# EAGLE board SparkFun_Qwiic_Mini_UV_Sensor_AS7331-Panel (EAGLE 9.6.2), part 1 of 7
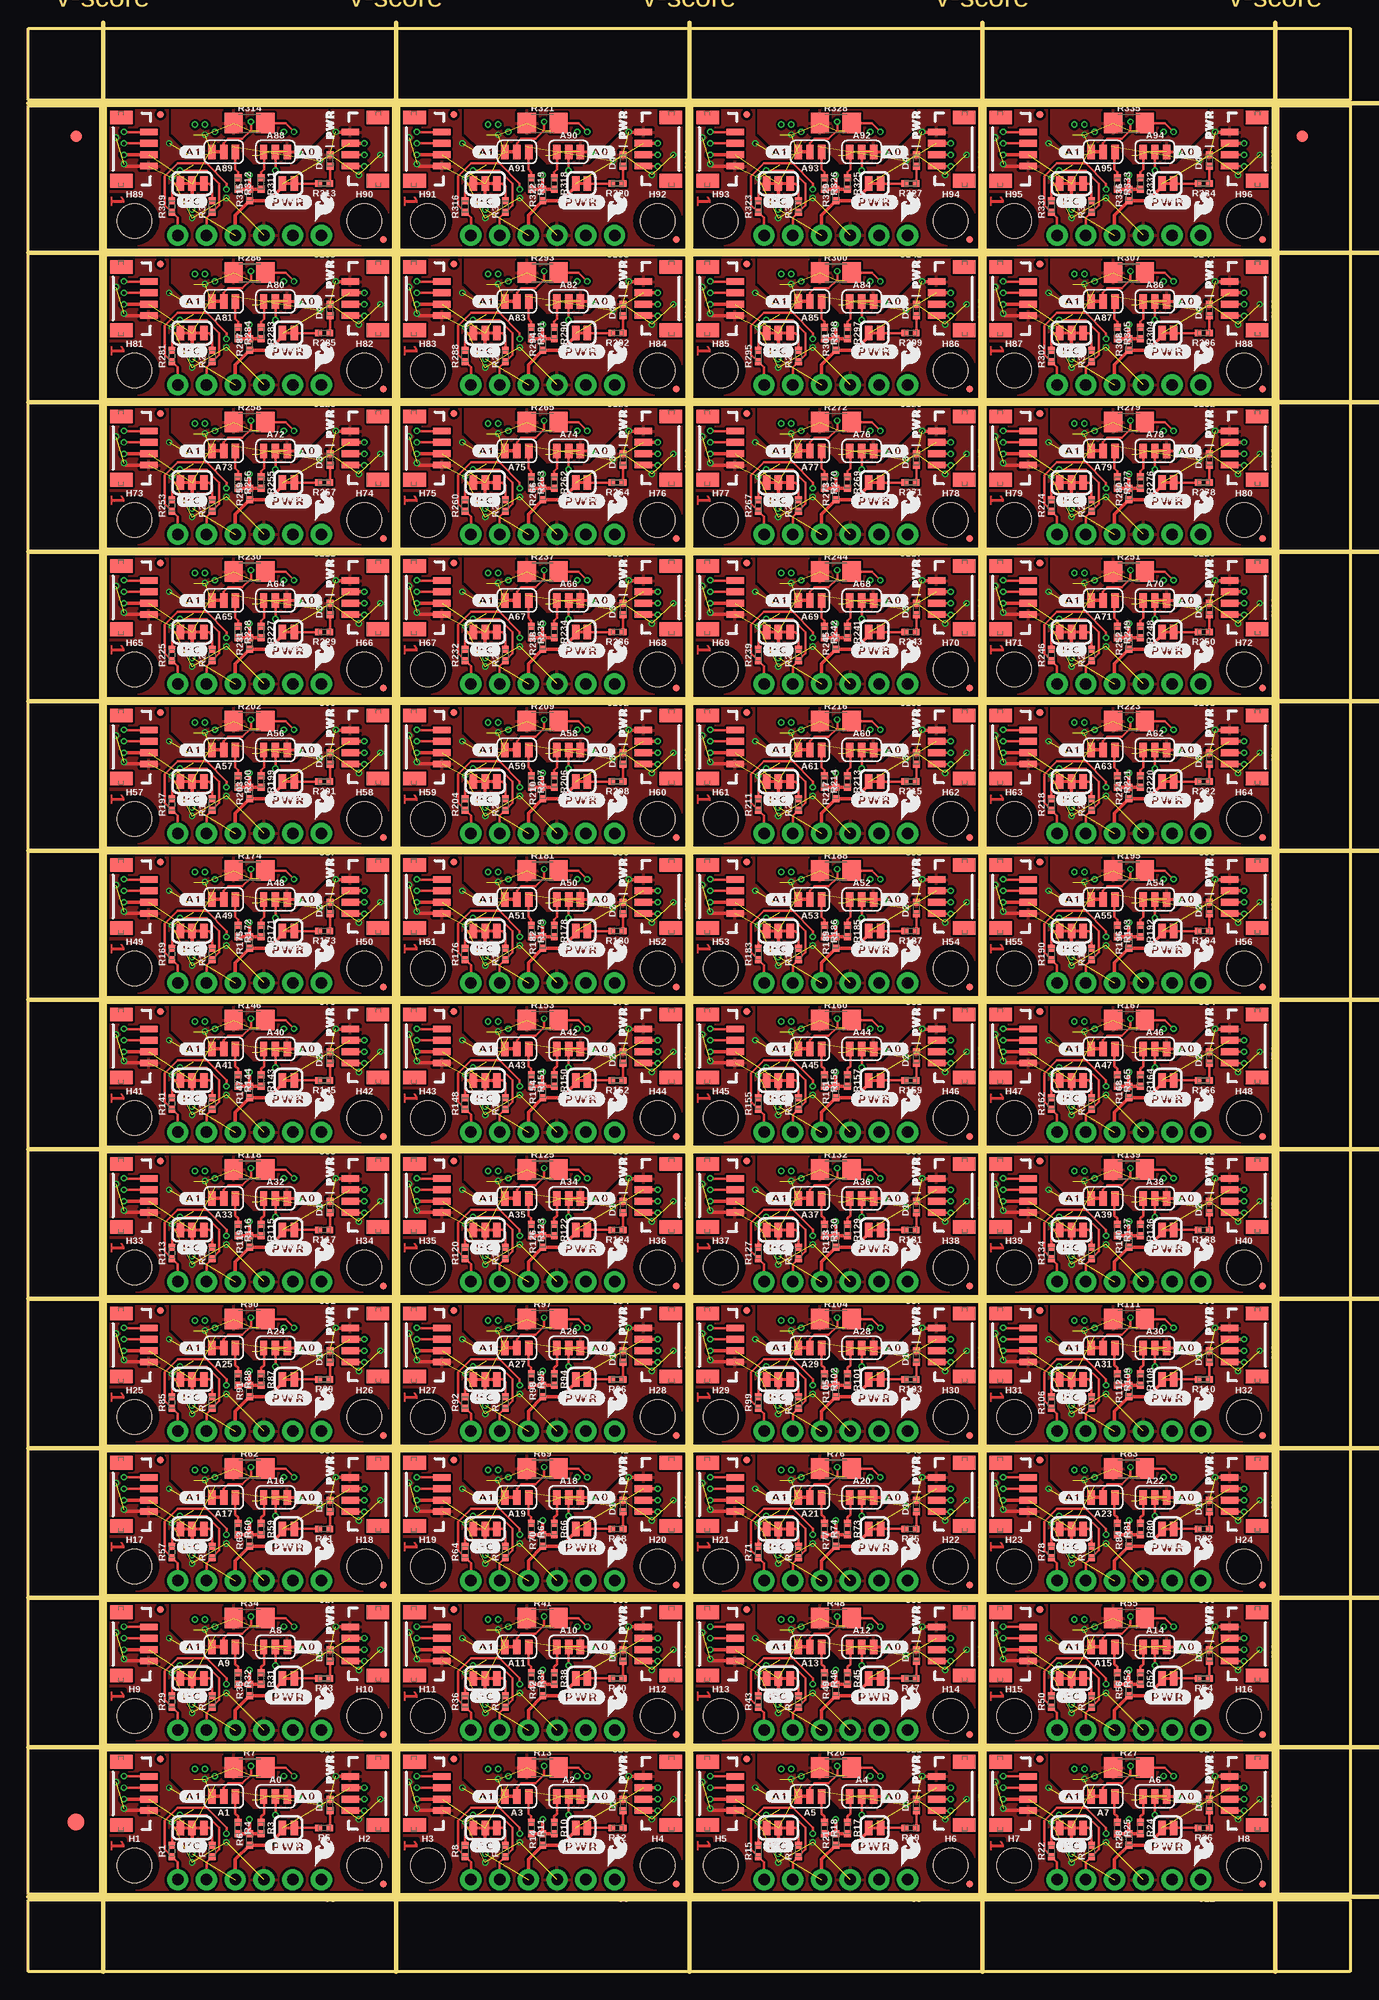
[diagram p0: board, top side]
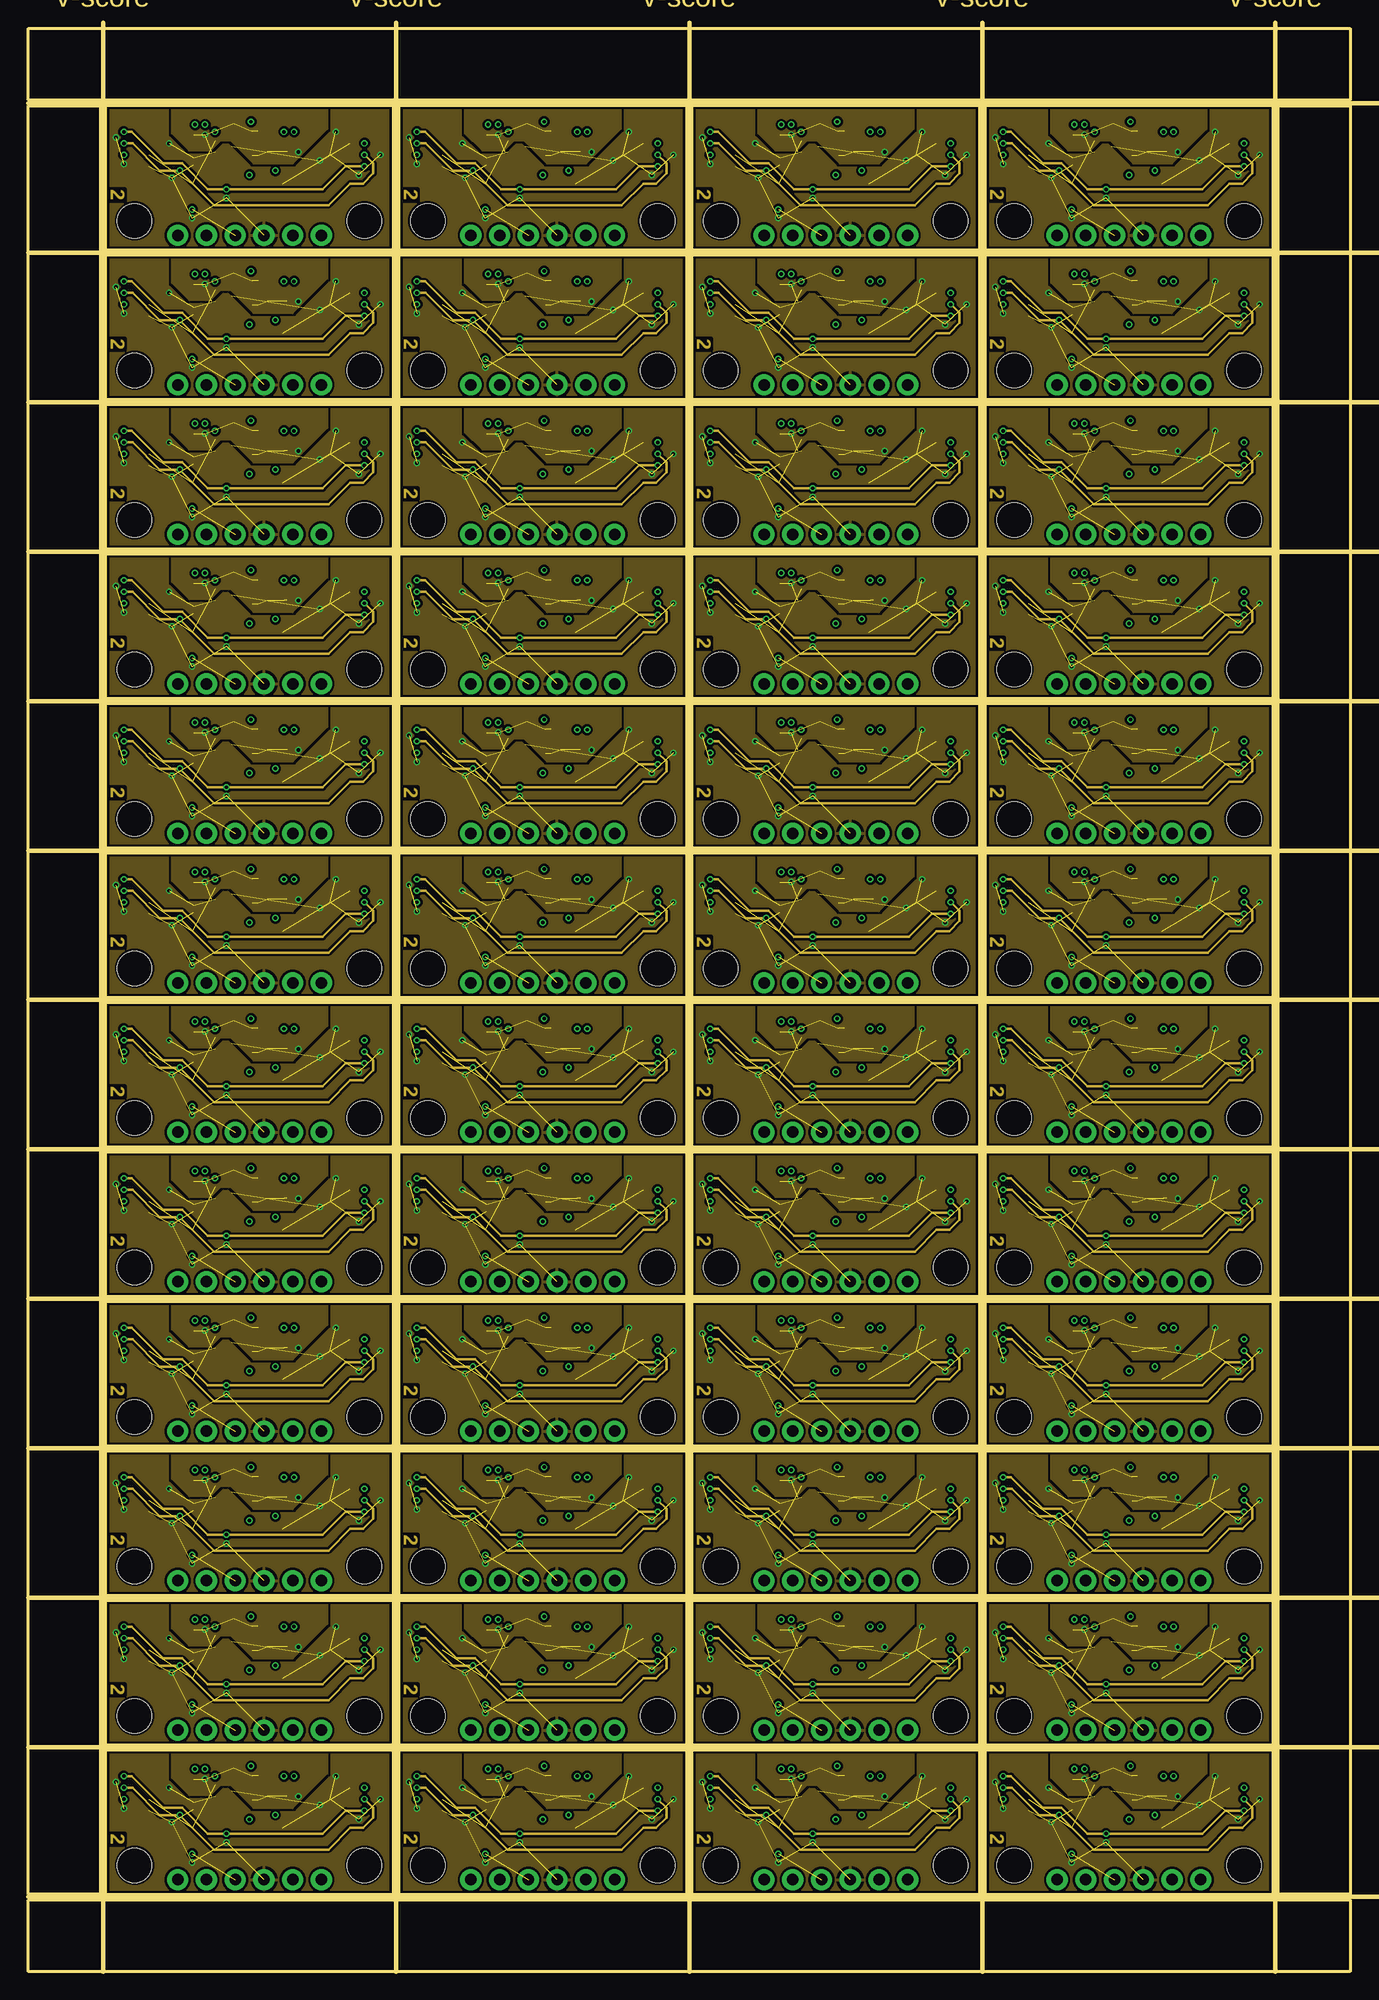
[diagram p1: board, inner layer Route2]
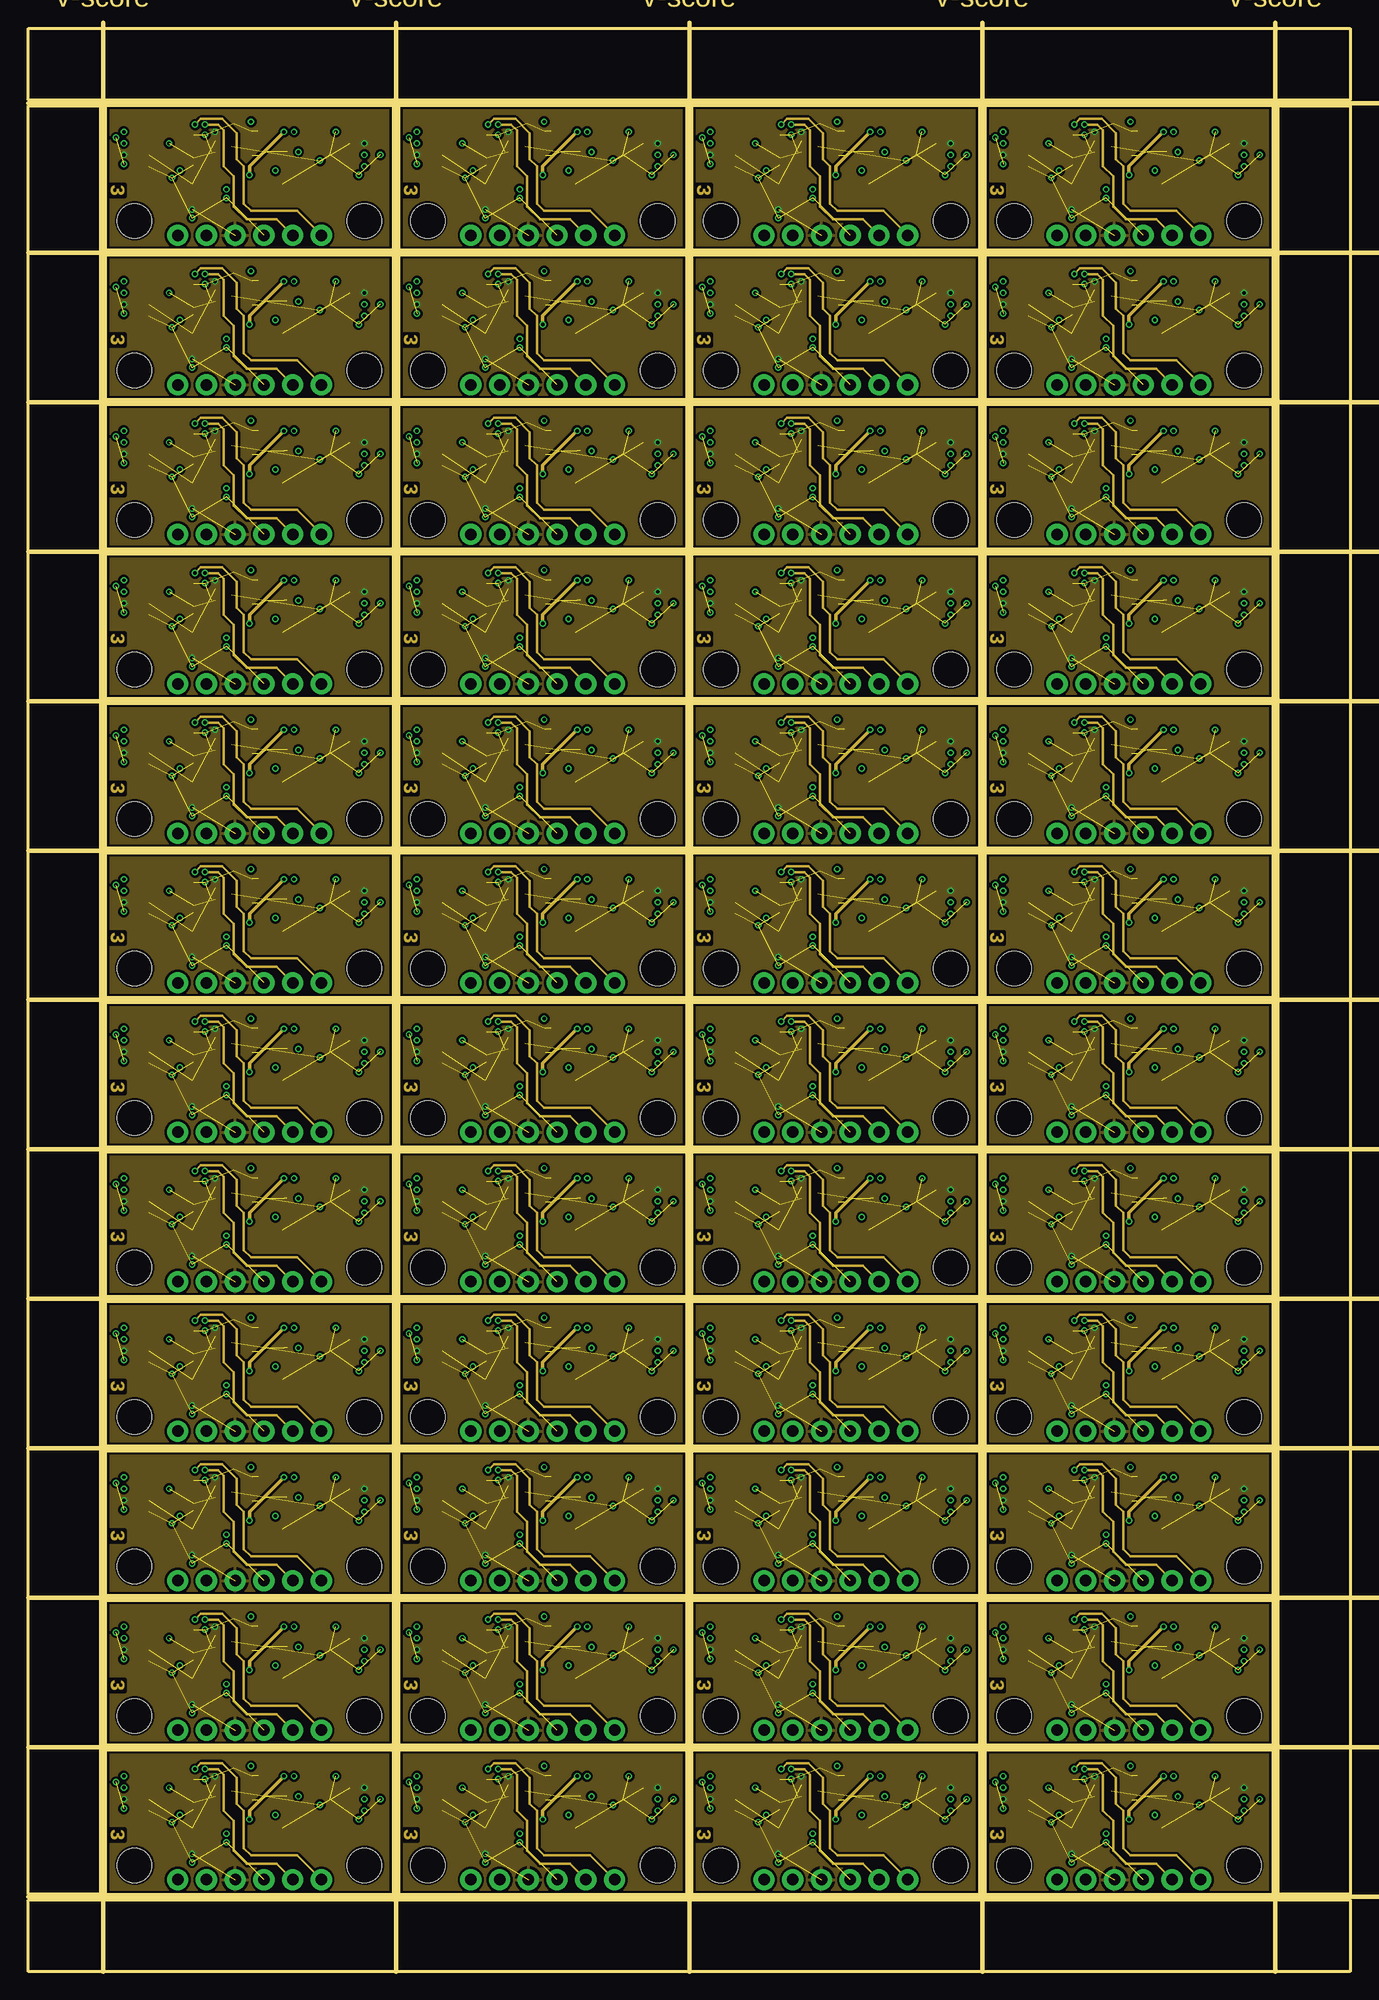
[diagram p2: board, inner layer Route15]
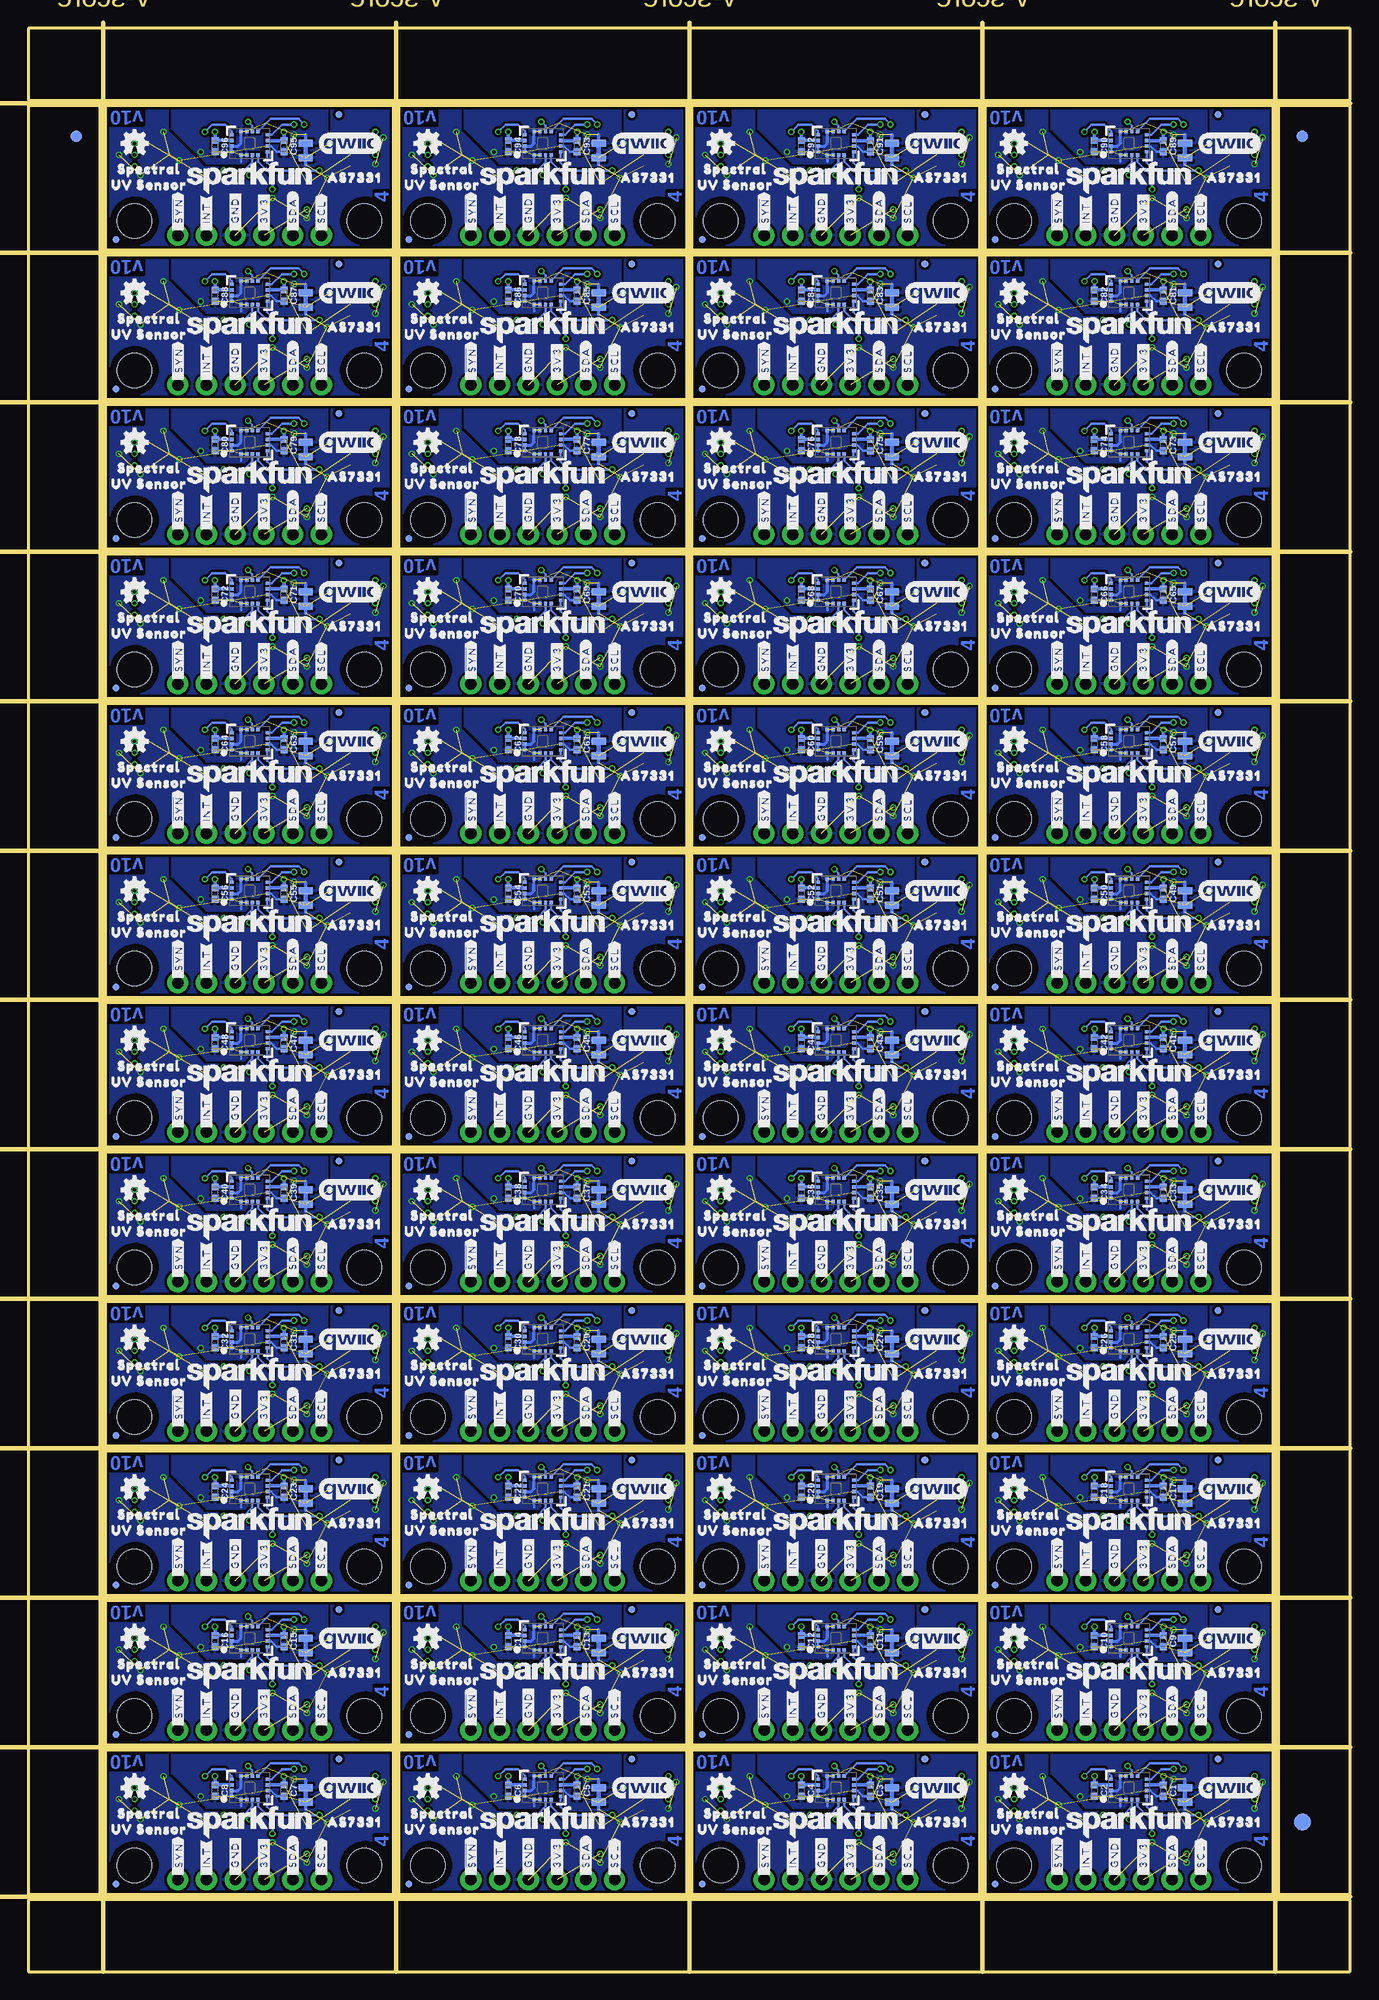
[diagram p3: board, bottom side, seen from below]

Size 116.84 x 171.7 mm. Coordinates in mm from the lower left corner, seen from the top.
Outline: 208 segments
Copper layers (1*2*15*16): Top 0.035559375mm / dielectric 0.47751875mm / Route2 0.035559375mm / dielectric 0.47751875mm / Route15 0.035559375mm / dielectric 0.47751875mm / Bottom 0.035559375mm
Design rules "SparkFun_Qwiic_Mini_UV_Sensor_AS7331": minimum track width 5mil, minimum drill 0.2mm, track to track 5mil, track to pad 5mil, pad to pad 5mil, via to via 5mil, smd to smd 5mil, copper to edge 7mil, drill to drill 7mil, minimum pad ring 5mil, minimum via ring 5mil, stop-mask expansion 2.5mil, vias tented up to drill 25mil, thermal gap 10mil
tRestrict: area 23,14.6 to 23.2,14.7; area 48.9,14.6 to 49.1,14.7; area 74.8,14.6 to 75.1,14.7; area 100.7,14.6 to 101,14.7; area 23,27.8 to 23.2,27.9; area 48.9,27.8 to 49.1,27.9; area 74.8,27.8 to 75.1,27.9; area 100.7,27.8 to 101,27.9; area 23,41 to 23.2,41.1; area 48.9,41 to 49.1,41.1; area 74.8,41 to 75.1,41.1; area 100.7,41 to 101,41.1; 36 more areas
Milling: 18 lines

## Footprints (pad centres in the part's own frame; a part is rotated, then mirrored left to right if it is on the bottom)
SMT-JUMPER_3_1-NC_TRACE_SILK = smd 0.66 x 1.27: 1 -1.041,0; 2 0,0; 3 1.041,0
0402-TIGHT = smd 0.6 x 0.6: 1 -0.5,0; 2 0.5,0
LED-0402 = smd 0.6 x 0.6: A -0.5,0; C 0.5,0
FIDUCIAL-1X2 = smd 1 x 1: 1 0,0
FIDUCIAL-1.5X3 = smd 1.5 x 1.5: 1 0,0
FIDUCIAL-MICRO = smd 0.635 x 0.635: 1 0,0
STAND-OFF-TIGHT = hole 3.048: 0,0
SMT-JUMPER_3_2-NC_TRACE_SILK = smd 0.66 x 1.27: 1 -1.041,0; 2 0,0; 3 1.041,0
JST04_1MM_VERT = smd 0.6 x 1.55: 1 -1.5,0.775; 2 -0.5,0.775; 3 0.5,0.775; 4 1.5,0.775 | smd 1.2 x 2: NC1 -2.8,3.2; NC2 2.8,3.2
1X06_NO_SILK = drill 1.016 pad 1.88: 1 0,0; 2 2.54,0; 3 5.08,0; 4 7.62,0; 5 10.16,0; 6 12.7,0
SMT-JUMPER_2_NC_TRACE_SILK = smd 0.66 x 1.27: 1 -0.521,0; 2 0.521,0
1206 = smd 1.6 x 1.8: 1 -1.4,0; 2 1.4,0
2PT_GND_TIE = smd 1.27 x 0.635: P$1 0,0.635; P$2 0,-0.635
OLGA16 = smd 0.3 x 0.3: 1 -0.75,1.575; 2 -0.25,1.575; 3 0.25,1.575; 4 0.75,1.575; 5 1.05,0.75; 6 1.05,0.25; 7 1.05,-0.25; 8 1.05,-0.75; 9 0.75,-1.575; 10 0.25,-1.575; 11 -0.25,-1.575; 12 -0.75,-1.575; 13 -1.05,-0.75; 14 -1.05,-0.25; 15 -1.05,0.25; 16 -1.05,0.75

## Placement (x,y rotation side)
A0  JUMPER-SMT_3_1-NC_TRACE_SILK  [SMT-JUMPER_3_1-NC_TRACE_SILK]  21.84,15.49 0 top
A1  JUMPER-SMT_3_1-NC_TRACE_SILK  [SMT-JUMPER_3_1-NC_TRACE_SILK]  17.27,15.49 180 top
A2  JUMPER-SMT_3_1-NC_TRACE_SILK  [SMT-JUMPER_3_1-NC_TRACE_SILK]  47.75,15.49 0 top
A3  JUMPER-SMT_3_1-NC_TRACE_SILK  [SMT-JUMPER_3_1-NC_TRACE_SILK]  43.18,15.49 180 top
A4  JUMPER-SMT_3_1-NC_TRACE_SILK  [SMT-JUMPER_3_1-NC_TRACE_SILK]  73.66,15.49 0 top
A5  JUMPER-SMT_3_1-NC_TRACE_SILK  [SMT-JUMPER_3_1-NC_TRACE_SILK]  69.09,15.49 180 top
A6  JUMPER-SMT_3_1-NC_TRACE_SILK  [SMT-JUMPER_3_1-NC_TRACE_SILK]  99.57,15.49 0 top
A7  JUMPER-SMT_3_1-NC_TRACE_SILK  [SMT-JUMPER_3_1-NC_TRACE_SILK]  95,15.49 180 top
A8  JUMPER-SMT_3_1-NC_TRACE_SILK  [SMT-JUMPER_3_1-NC_TRACE_SILK]  21.84,28.7 0 top
A9  JUMPER-SMT_3_1-NC_TRACE_SILK  [SMT-JUMPER_3_1-NC_TRACE_SILK]  17.27,28.7 180 top
A10  JUMPER-SMT_3_1-NC_TRACE_SILK  [SMT-JUMPER_3_1-NC_TRACE_SILK]  47.75,28.7 0 top
A11  JUMPER-SMT_3_1-NC_TRACE_SILK  [SMT-JUMPER_3_1-NC_TRACE_SILK]  43.18,28.7 180 top
A12  JUMPER-SMT_3_1-NC_TRACE_SILK  [SMT-JUMPER_3_1-NC_TRACE_SILK]  73.66,28.7 0 top
A13  JUMPER-SMT_3_1-NC_TRACE_SILK  [SMT-JUMPER_3_1-NC_TRACE_SILK]  69.09,28.7 180 top
A14  JUMPER-SMT_3_1-NC_TRACE_SILK  [SMT-JUMPER_3_1-NC_TRACE_SILK]  99.57,28.7 0 top
A15  JUMPER-SMT_3_1-NC_TRACE_SILK  [SMT-JUMPER_3_1-NC_TRACE_SILK]  95,28.7 180 top
A16  JUMPER-SMT_3_1-NC_TRACE_SILK  [SMT-JUMPER_3_1-NC_TRACE_SILK]  21.84,41.91 0 top
A17  JUMPER-SMT_3_1-NC_TRACE_SILK  [SMT-JUMPER_3_1-NC_TRACE_SILK]  17.27,41.91 180 top
A18  JUMPER-SMT_3_1-NC_TRACE_SILK  [SMT-JUMPER_3_1-NC_TRACE_SILK]  47.75,41.91 0 top
A19  JUMPER-SMT_3_1-NC_TRACE_SILK  [SMT-JUMPER_3_1-NC_TRACE_SILK]  43.18,41.91 180 top
A20  JUMPER-SMT_3_1-NC_TRACE_SILK  [SMT-JUMPER_3_1-NC_TRACE_SILK]  73.66,41.91 0 top
A21  JUMPER-SMT_3_1-NC_TRACE_SILK  [SMT-JUMPER_3_1-NC_TRACE_SILK]  69.09,41.91 180 top
A22  JUMPER-SMT_3_1-NC_TRACE_SILK  [SMT-JUMPER_3_1-NC_TRACE_SILK]  99.57,41.91 0 top
A23  JUMPER-SMT_3_1-NC_TRACE_SILK  [SMT-JUMPER_3_1-NC_TRACE_SILK]  95,41.91 180 top
A24  JUMPER-SMT_3_1-NC_TRACE_SILK  [SMT-JUMPER_3_1-NC_TRACE_SILK]  21.84,55.12 0 top
A25  JUMPER-SMT_3_1-NC_TRACE_SILK  [SMT-JUMPER_3_1-NC_TRACE_SILK]  17.27,55.12 180 top
A26  JUMPER-SMT_3_1-NC_TRACE_SILK  [SMT-JUMPER_3_1-NC_TRACE_SILK]  47.75,55.12 0 top
A27  JUMPER-SMT_3_1-NC_TRACE_SILK  [SMT-JUMPER_3_1-NC_TRACE_SILK]  43.18,55.12 180 top
A28  JUMPER-SMT_3_1-NC_TRACE_SILK  [SMT-JUMPER_3_1-NC_TRACE_SILK]  73.66,55.12 0 top
A29  JUMPER-SMT_3_1-NC_TRACE_SILK  [SMT-JUMPER_3_1-NC_TRACE_SILK]  69.09,55.12 180 top
A30  JUMPER-SMT_3_1-NC_TRACE_SILK  [SMT-JUMPER_3_1-NC_TRACE_SILK]  99.57,55.12 0 top
A31  JUMPER-SMT_3_1-NC_TRACE_SILK  [SMT-JUMPER_3_1-NC_TRACE_SILK]  95,55.12 180 top
A32  JUMPER-SMT_3_1-NC_TRACE_SILK  [SMT-JUMPER_3_1-NC_TRACE_SILK]  21.84,68.33 0 top
A33  JUMPER-SMT_3_1-NC_TRACE_SILK  [SMT-JUMPER_3_1-NC_TRACE_SILK]  17.27,68.33 180 top
A34  JUMPER-SMT_3_1-NC_TRACE_SILK  [SMT-JUMPER_3_1-NC_TRACE_SILK]  47.75,68.33 0 top
A35  JUMPER-SMT_3_1-NC_TRACE_SILK  [SMT-JUMPER_3_1-NC_TRACE_SILK]  43.18,68.33 180 top
A36  JUMPER-SMT_3_1-NC_TRACE_SILK  [SMT-JUMPER_3_1-NC_TRACE_SILK]  73.66,68.33 0 top
A37  JUMPER-SMT_3_1-NC_TRACE_SILK  [SMT-JUMPER_3_1-NC_TRACE_SILK]  69.09,68.33 180 top
A38  JUMPER-SMT_3_1-NC_TRACE_SILK  [SMT-JUMPER_3_1-NC_TRACE_SILK]  99.57,68.33 0 top
A39  JUMPER-SMT_3_1-NC_TRACE_SILK  [SMT-JUMPER_3_1-NC_TRACE_SILK]  95,68.33 180 top
A40  JUMPER-SMT_3_1-NC_TRACE_SILK  [SMT-JUMPER_3_1-NC_TRACE_SILK]  21.84,81.53 0 top
A41  JUMPER-SMT_3_1-NC_TRACE_SILK  [SMT-JUMPER_3_1-NC_TRACE_SILK]  17.27,81.53 180 top
A42  JUMPER-SMT_3_1-NC_TRACE_SILK  [SMT-JUMPER_3_1-NC_TRACE_SILK]  47.75,81.53 0 top
A43  JUMPER-SMT_3_1-NC_TRACE_SILK  [SMT-JUMPER_3_1-NC_TRACE_SILK]  43.18,81.53 180 top
A44  JUMPER-SMT_3_1-NC_TRACE_SILK  [SMT-JUMPER_3_1-NC_TRACE_SILK]  73.66,81.53 0 top
A45  JUMPER-SMT_3_1-NC_TRACE_SILK  [SMT-JUMPER_3_1-NC_TRACE_SILK]  69.09,81.53 180 top
A46  JUMPER-SMT_3_1-NC_TRACE_SILK  [SMT-JUMPER_3_1-NC_TRACE_SILK]  99.57,81.53 0 top
A47  JUMPER-SMT_3_1-NC_TRACE_SILK  [SMT-JUMPER_3_1-NC_TRACE_SILK]  95,81.53 180 top
A48  JUMPER-SMT_3_1-NC_TRACE_SILK  [SMT-JUMPER_3_1-NC_TRACE_SILK]  21.84,94.74 0 top
A49  JUMPER-SMT_3_1-NC_TRACE_SILK  [SMT-JUMPER_3_1-NC_TRACE_SILK]  17.27,94.74 180 top
A50  JUMPER-SMT_3_1-NC_TRACE_SILK  [SMT-JUMPER_3_1-NC_TRACE_SILK]  47.75,94.74 0 top
A51  JUMPER-SMT_3_1-NC_TRACE_SILK  [SMT-JUMPER_3_1-NC_TRACE_SILK]  43.18,94.74 180 top
A52  JUMPER-SMT_3_1-NC_TRACE_SILK  [SMT-JUMPER_3_1-NC_TRACE_SILK]  73.66,94.74 0 top
A53  JUMPER-SMT_3_1-NC_TRACE_SILK  [SMT-JUMPER_3_1-NC_TRACE_SILK]  69.09,94.74 180 top
A54  JUMPER-SMT_3_1-NC_TRACE_SILK  [SMT-JUMPER_3_1-NC_TRACE_SILK]  99.57,94.74 0 top
A55  JUMPER-SMT_3_1-NC_TRACE_SILK  [SMT-JUMPER_3_1-NC_TRACE_SILK]  95,94.74 180 top
A56  JUMPER-SMT_3_1-NC_TRACE_SILK  [SMT-JUMPER_3_1-NC_TRACE_SILK]  21.84,107.95 0 top
A57  JUMPER-SMT_3_1-NC_TRACE_SILK  [SMT-JUMPER_3_1-NC_TRACE_SILK]  17.27,107.95 180 top
A58  JUMPER-SMT_3_1-NC_TRACE_SILK  [SMT-JUMPER_3_1-NC_TRACE_SILK]  47.75,107.95 0 top
A59  JUMPER-SMT_3_1-NC_TRACE_SILK  [SMT-JUMPER_3_1-NC_TRACE_SILK]  43.18,107.95 180 top
A60  JUMPER-SMT_3_1-NC_TRACE_SILK  [SMT-JUMPER_3_1-NC_TRACE_SILK]  73.66,107.95 0 top
A61  JUMPER-SMT_3_1-NC_TRACE_SILK  [SMT-JUMPER_3_1-NC_TRACE_SILK]  69.09,107.95 180 top
A62  JUMPER-SMT_3_1-NC_TRACE_SILK  [SMT-JUMPER_3_1-NC_TRACE_SILK]  99.57,107.95 0 top
A63  JUMPER-SMT_3_1-NC_TRACE_SILK  [SMT-JUMPER_3_1-NC_TRACE_SILK]  95,107.95 180 top
A64  JUMPER-SMT_3_1-NC_TRACE_SILK  [SMT-JUMPER_3_1-NC_TRACE_SILK]  21.84,121.16 0 top
A65  JUMPER-SMT_3_1-NC_TRACE_SILK  [SMT-JUMPER_3_1-NC_TRACE_SILK]  17.27,121.16 180 top
A66  JUMPER-SMT_3_1-NC_TRACE_SILK  [SMT-JUMPER_3_1-NC_TRACE_SILK]  47.75,121.16 0 top
A67  JUMPER-SMT_3_1-NC_TRACE_SILK  [SMT-JUMPER_3_1-NC_TRACE_SILK]  43.18,121.16 180 top
A68  JUMPER-SMT_3_1-NC_TRACE_SILK  [SMT-JUMPER_3_1-NC_TRACE_SILK]  73.66,121.16 0 top
A69  JUMPER-SMT_3_1-NC_TRACE_SILK  [SMT-JUMPER_3_1-NC_TRACE_SILK]  69.09,121.16 180 top
A70  JUMPER-SMT_3_1-NC_TRACE_SILK  [SMT-JUMPER_3_1-NC_TRACE_SILK]  99.57,121.16 0 top
A71  JUMPER-SMT_3_1-NC_TRACE_SILK  [SMT-JUMPER_3_1-NC_TRACE_SILK]  95,121.16 180 top
A72  JUMPER-SMT_3_1-NC_TRACE_SILK  [SMT-JUMPER_3_1-NC_TRACE_SILK]  21.84,134.37 0 top
A73  JUMPER-SMT_3_1-NC_TRACE_SILK  [SMT-JUMPER_3_1-NC_TRACE_SILK]  17.27,134.37 180 top
A74  JUMPER-SMT_3_1-NC_TRACE_SILK  [SMT-JUMPER_3_1-NC_TRACE_SILK]  47.75,134.37 0 top
A75  JUMPER-SMT_3_1-NC_TRACE_SILK  [SMT-JUMPER_3_1-NC_TRACE_SILK]  43.18,134.37 180 top
A76  JUMPER-SMT_3_1-NC_TRACE_SILK  [SMT-JUMPER_3_1-NC_TRACE_SILK]  73.66,134.37 0 top
A77  JUMPER-SMT_3_1-NC_TRACE_SILK  [SMT-JUMPER_3_1-NC_TRACE_SILK]  69.09,134.37 180 top
A78  JUMPER-SMT_3_1-NC_TRACE_SILK  [SMT-JUMPER_3_1-NC_TRACE_SILK]  99.57,134.37 0 top
A79  JUMPER-SMT_3_1-NC_TRACE_SILK  [SMT-JUMPER_3_1-NC_TRACE_SILK]  95,134.37 180 top
A80  JUMPER-SMT_3_1-NC_TRACE_SILK  [SMT-JUMPER_3_1-NC_TRACE_SILK]  21.84,147.57 0 top
A81  JUMPER-SMT_3_1-NC_TRACE_SILK  [SMT-JUMPER_3_1-NC_TRACE_SILK]  17.27,147.57 180 top
A82  JUMPER-SMT_3_1-NC_TRACE_SILK  [SMT-JUMPER_3_1-NC_TRACE_SILK]  47.75,147.57 0 top
A83  JUMPER-SMT_3_1-NC_TRACE_SILK  [SMT-JUMPER_3_1-NC_TRACE_SILK]  43.18,147.57 180 top
A84  JUMPER-SMT_3_1-NC_TRACE_SILK  [SMT-JUMPER_3_1-NC_TRACE_SILK]  73.66,147.57 0 top
A85  JUMPER-SMT_3_1-NC_TRACE_SILK  [SMT-JUMPER_3_1-NC_TRACE_SILK]  69.09,147.57 180 top
A86  JUMPER-SMT_3_1-NC_TRACE_SILK  [SMT-JUMPER_3_1-NC_TRACE_SILK]  99.57,147.57 0 top
A87  JUMPER-SMT_3_1-NC_TRACE_SILK  [SMT-JUMPER_3_1-NC_TRACE_SILK]  95,147.57 180 top
A88  JUMPER-SMT_3_1-NC_TRACE_SILK  [SMT-JUMPER_3_1-NC_TRACE_SILK]  21.84,160.78 0 top
A89  JUMPER-SMT_3_1-NC_TRACE_SILK  [SMT-JUMPER_3_1-NC_TRACE_SILK]  17.27,160.78 180 top
A90  JUMPER-SMT_3_1-NC_TRACE_SILK  [SMT-JUMPER_3_1-NC_TRACE_SILK]  47.75,160.78 0 top
A91  JUMPER-SMT_3_1-NC_TRACE_SILK  [SMT-JUMPER_3_1-NC_TRACE_SILK]  43.18,160.78 180 top
A92  JUMPER-SMT_3_1-NC_TRACE_SILK  [SMT-JUMPER_3_1-NC_TRACE_SILK]  73.66,160.78 0 top
A93  JUMPER-SMT_3_1-NC_TRACE_SILK  [SMT-JUMPER_3_1-NC_TRACE_SILK]  69.09,160.78 180 top
A94  JUMPER-SMT_3_1-NC_TRACE_SILK  [SMT-JUMPER_3_1-NC_TRACE_SILK]  99.57,160.78 0 top
A95  JUMPER-SMT_3_1-NC_TRACE_SILK  [SMT-JUMPER_3_1-NC_TRACE_SILK]  95,160.78 180 top
C1  0.1uF  [0402-TIGHT]  16.51,16 270 bottom
C2  0.1uF  [0402-TIGHT]  22.61,16 270 bottom
C3  0.1uF  [0402-TIGHT]  42.42,16 270 bottom
C4  0.1uF  [0402-TIGHT]  48.51,16 270 bottom
C5  0.1uF  [0402-TIGHT]  68.33,16 270 bottom
C6  0.1uF  [0402-TIGHT]  74.42,16 270 bottom
C7  0.1uF  [0402-TIGHT]  94.23,16 270 bottom
C8  0.1uF  [0402-TIGHT]  100.33,16 270 bottom
C9  0.1uF  [0402-TIGHT]  16.51,29.21 270 bottom
C10  0.1uF  [0402-TIGHT]  22.61,29.21 270 bottom
C11  0.1uF  [0402-TIGHT]  42.42,29.21 270 bottom
C12  0.1uF  [0402-TIGHT]  48.51,29.21 270 bottom
C13  0.1uF  [0402-TIGHT]  68.33,29.21 270 bottom
C14  0.1uF  [0402-TIGHT]  74.42,29.21 270 bottom
C15  0.1uF  [0402-TIGHT]  94.23,29.21 270 bottom
C16  0.1uF  [0402-TIGHT]  100.33,29.21 270 bottom
C17  0.1uF  [0402-TIGHT]  16.51,42.42 270 bottom
C18  0.1uF  [0402-TIGHT]  22.61,42.42 270 bottom
C19  0.1uF  [0402-TIGHT]  42.42,42.42 270 bottom
C20  0.1uF  [0402-TIGHT]  48.51,42.42 270 bottom
C21  0.1uF  [0402-TIGHT]  68.33,42.42 270 bottom
C22  0.1uF  [0402-TIGHT]  74.42,42.42 270 bottom
C23  0.1uF  [0402-TIGHT]  94.23,42.42 270 bottom
C24  0.1uF  [0402-TIGHT]  100.33,42.42 270 bottom
C25  0.1uF  [0402-TIGHT]  16.51,55.63 270 bottom
C26  0.1uF  [0402-TIGHT]  22.61,55.63 270 bottom
C27  0.1uF  [0402-TIGHT]  42.42,55.63 270 bottom
C28  0.1uF  [0402-TIGHT]  48.51,55.63 270 bottom
C29  0.1uF  [0402-TIGHT]  68.33,55.63 270 bottom
C30  0.1uF  [0402-TIGHT]  74.42,55.63 270 bottom
C31  0.1uF  [0402-TIGHT]  94.23,55.63 270 bottom
C32  0.1uF  [0402-TIGHT]  100.33,55.63 270 bottom
C33  0.1uF  [0402-TIGHT]  16.51,68.83 270 bottom
C34  0.1uF  [0402-TIGHT]  22.61,68.83 270 bottom
C35  0.1uF  [0402-TIGHT]  42.42,68.83 270 bottom
C36  0.1uF  [0402-TIGHT]  48.51,68.83 270 bottom
C37  0.1uF  [0402-TIGHT]  68.33,68.83 270 bottom
C38  0.1uF  [0402-TIGHT]  74.42,68.83 270 bottom
C39  0.1uF  [0402-TIGHT]  94.23,68.83 270 bottom
C40  0.1uF  [0402-TIGHT]  100.33,68.83 270 bottom
C41  0.1uF  [0402-TIGHT]  16.51,82.04 270 bottom
C42  0.1uF  [0402-TIGHT]  22.61,82.04 270 bottom
C43  0.1uF  [0402-TIGHT]  42.42,82.04 270 bottom
C44  0.1uF  [0402-TIGHT]  48.51,82.04 270 bottom
C45  0.1uF  [0402-TIGHT]  68.33,82.04 270 bottom
C46  0.1uF  [0402-TIGHT]  74.42,82.04 270 bottom
C47  0.1uF  [0402-TIGHT]  94.23,82.04 270 bottom
C48  0.1uF  [0402-TIGHT]  100.33,82.04 270 bottom
C49  0.1uF  [0402-TIGHT]  16.51,95.25 270 bottom
C50  0.1uF  [0402-TIGHT]  22.61,95.25 270 bottom
C51  0.1uF  [0402-TIGHT]  42.42,95.25 270 bottom
C52  0.1uF  [0402-TIGHT]  48.51,95.25 270 bottom
C53  0.1uF  [0402-TIGHT]  68.33,95.25 270 bottom
C54  0.1uF  [0402-TIGHT]  74.42,95.25 270 bottom
C55  0.1uF  [0402-TIGHT]  94.23,95.25 270 bottom
C56  0.1uF  [0402-TIGHT]  100.33,95.25 270 bottom
C57  0.1uF  [0402-TIGHT]  16.51,108.46 270 bottom
C58  0.1uF  [0402-TIGHT]  22.61,108.46 270 bottom
C59  0.1uF  [0402-TIGHT]  42.42,108.46 270 bottom
C60  0.1uF  [0402-TIGHT]  48.51,108.46 270 bottom
C61  0.1uF  [0402-TIGHT]  68.33,108.46 270 bottom
C62  0.1uF  [0402-TIGHT]  74.42,108.46 270 bottom
C63  0.1uF  [0402-TIGHT]  94.23,108.46 270 bottom
C64  0.1uF  [0402-TIGHT]  100.33,108.46 270 bottom
C65  0.1uF  [0402-TIGHT]  16.51,121.67 270 bottom
C66  0.1uF  [0402-TIGHT]  22.61,121.67 270 bottom
C67  0.1uF  [0402-TIGHT]  42.42,121.67 270 bottom
C68  0.1uF  [0402-TIGHT]  48.51,121.67 270 bottom
C69  0.1uF  [0402-TIGHT]  68.33,121.67 270 bottom
C70  0.1uF  [0402-TIGHT]  74.42,121.67 270 bottom
C71  0.1uF  [0402-TIGHT]  94.23,121.67 270 bottom
C72  0.1uF  [0402-TIGHT]  100.33,121.67 270 bottom
C73  0.1uF  [0402-TIGHT]  16.51,134.87 270 bottom
C74  0.1uF  [0402-TIGHT]  22.61,134.87 270 bottom
C75  0.1uF  [0402-TIGHT]  42.42,134.87 270 bottom
C76  0.1uF  [0402-TIGHT]  48.51,134.87 270 bottom
C77  0.1uF  [0402-TIGHT]  68.33,134.87 270 bottom
C78  0.1uF  [0402-TIGHT]  74.42,134.87 270 bottom
C79  0.1uF  [0402-TIGHT]  94.23,134.87 270 bottom
C80  0.1uF  [0402-TIGHT]  100.33,134.87 270 bottom
C81  0.1uF  [0402-TIGHT]  16.51,148.08 270 bottom
C82  0.1uF  [0402-TIGHT]  22.61,148.08 270 bottom
C83  0.1uF  [0402-TIGHT]  42.42,148.08 270 bottom
C84  0.1uF  [0402-TIGHT]  48.51,148.08 270 bottom
C85  0.1uF  [0402-TIGHT]  68.33,148.08 270 bottom
C86  0.1uF  [0402-TIGHT]  74.42,148.08 270 bottom
C87  0.1uF  [0402-TIGHT]  94.23,148.08 270 bottom
C88  0.1uF  [0402-TIGHT]  100.33,148.08 270 bottom
C89  0.1uF  [0402-TIGHT]  16.51,161.29 270 bottom
C90  0.1uF  [0402-TIGHT]  22.61,161.29 270 bottom
C91  0.1uF  [0402-TIGHT]  42.42,161.29 270 bottom
C92  0.1uF  [0402-TIGHT]  48.51,161.29 270 bottom
C93  0.1uF  [0402-TIGHT]  68.33,161.29 270 bottom
C94  0.1uF  [0402-TIGHT]  74.42,161.29 270 bottom
C95  0.1uF  [0402-TIGHT]  94.23,161.29 270 bottom
C96  0.1uF  [0402-TIGHT]  100.33,161.29 270 bottom
D1  RED  [LED-0402]  26.67,14.73 90 top
D2  RED  [LED-0402]  52.58,14.73 90 top
D3  RED  [LED-0402]  78.49,14.73 90 top
D4  RED  [LED-0402]  104.39,14.73 90 top
D5  RED  [LED-0402]  26.67,27.94 90 top
D6  RED  [LED-0402]  52.58,27.94 90 top
D7  RED  [LED-0402]  78.49,27.94 90 top
D8  RED  [LED-0402]  104.39,27.94 90 top
D9  RED  [LED-0402]  26.67,41.15 90 top
D10  RED  [LED-0402]  52.58,41.15 90 top
D11  RED  [LED-0402]  78.49,41.15 90 top
D12  RED  [LED-0402]  104.39,41.15 90 top
D13  RED  [LED-0402]  26.67,54.36 90 top
D14  RED  [LED-0402]  52.58,54.36 90 top
D15  RED  [LED-0402]  78.49,54.36 90 top
D16  RED  [LED-0402]  104.39,54.36 90 top
D17  RED  [LED-0402]  26.67,67.56 90 top
D18  RED  [LED-0402]  52.58,67.56 90 top
D19  RED  [LED-0402]  78.49,67.56 90 top
D20  RED  [LED-0402]  104.39,67.56 90 top
D21  RED  [LED-0402]  26.67,80.77 90 top
D22  RED  [LED-0402]  52.58,80.77 90 top
D23  RED  [LED-0402]  78.49,80.77 90 top
D24  RED  [LED-0402]  104.39,80.77 90 top
D25  RED  [LED-0402]  26.67,93.98 90 top
D26  RED  [LED-0402]  52.58,93.98 90 top
D27  RED  [LED-0402]  78.49,93.98 90 top
D28  RED  [LED-0402]  104.39,93.98 90 top
D29  RED  [LED-0402]  26.67,107.19 90 top
D30  RED  [LED-0402]  52.58,107.19 90 top
D31  RED  [LED-0402]  78.49,107.19 90 top
D32  RED  [LED-0402]  104.39,107.19 90 top
D33  RED  [LED-0402]  26.67,120.4 90 top
D34  RED  [LED-0402]  52.58,120.4 90 top
D35  RED  [LED-0402]  78.49,120.4 90 top
D36  RED  [LED-0402]  104.39,120.4 90 top
D37  RED  [LED-0402]  26.67,133.6 90 top
D38  RED  [LED-0402]  52.58,133.6 90 top
D39  RED  [LED-0402]  78.49,133.6 90 top
D40  RED  [LED-0402]  104.39,133.6 90 top
D41  RED  [LED-0402]  26.67,146.81 90 top
D42  RED  [LED-0402]  52.58,146.81 90 top
D43  RED  [LED-0402]  78.49,146.81 90 top
D44  RED  [LED-0402]  104.39,146.81 90 top
D45  RED  [LED-0402]  26.67,160.02 90 top
D46  RED  [LED-0402]  52.58,160.02 90 top
D47  RED  [LED-0402]  78.49,160.02 90 top
D48  RED  [LED-0402]  104.39,160.02 90 top
E$1  [FIDUCIAL-1X2]  4.23,162.18 0 top
E$2  [FIDUCIAL-1X2]  4.23,162.18 0 bottom
E$3  [FIDUCIAL-1X2]  112.61,162.18 0 top
E$4  [FIDUCIAL-1X2]  112.61,162.18 0 bottom
E$5  [FIDUCIAL-1.5X3]  4.23,13.21 0 top
E$6  [FIDUCIAL-1.5X3]  4.23,13.21 0 bottom
FD1  FIDUCIALUFIDUCIAL  [FIDUCIAL-MICRO]  11.68,18.8 0 top
FD2  FIDUCIALUFIDUCIAL  [FIDUCIAL-MICRO]  31.37,7.75 0 top
FD3  FIDUCIALUFIDUCIAL  [FIDUCIAL-MICRO]  11.68,18.8 0 bottom
FD4  FIDUCIALUFIDUCIAL  [FIDUCIAL-MICRO]  31.37,7.75 0 bottom
FD5  FIDUCIALUFIDUCIAL  [FIDUCIAL-MICRO]  37.59,18.8 0 top
FD6  FIDUCIALUFIDUCIAL  [FIDUCIAL-MICRO]  57.28,7.75 0 top
FD7  FIDUCIALUFIDUCIAL  [FIDUCIAL-MICRO]  37.59,18.8 0 bottom
FD8  FIDUCIALUFIDUCIAL  [FIDUCIAL-MICRO]  57.28,7.75 0 bottom
FD9  FIDUCIALUFIDUCIAL  [FIDUCIAL-MICRO]  63.5,18.8 0 top
FD10  FIDUCIALUFIDUCIAL  [FIDUCIAL-MICRO]  83.19,7.75 0 top
FD11  FIDUCIALUFIDUCIAL  [FIDUCIAL-MICRO]  63.5,18.8 0 bottom
FD12  FIDUCIALUFIDUCIAL  [FIDUCIAL-MICRO]  83.19,7.75 0 bottom
FD13  FIDUCIALUFIDUCIAL  [FIDUCIAL-MICRO]  89.41,18.8 0 top
FD14  FIDUCIALUFIDUCIAL  [FIDUCIAL-MICRO]  109.09,7.75 0 top
FD15  FIDUCIALUFIDUCIAL  [FIDUCIAL-MICRO]  89.41,18.8 0 bottom
FD16  FIDUCIALUFIDUCIAL  [FIDUCIAL-MICRO]  109.09,7.75 0 bottom
FD17  FIDUCIALUFIDUCIAL  [FIDUCIAL-MICRO]  11.68,32 0 top
FD18  FIDUCIALUFIDUCIAL  [FIDUCIAL-MICRO]  31.37,20.95 0 top
FD19  FIDUCIALUFIDUCIAL  [FIDUCIAL-MICRO]  11.68,32 0 bottom
FD20  FIDUCIALUFIDUCIAL  [FIDUCIAL-MICRO]  31.37,20.95 0 bottom
FD21  FIDUCIALUFIDUCIAL  [FIDUCIAL-MICRO]  37.59,32 0 top
FD22  FIDUCIALUFIDUCIAL  [FIDUCIAL-MICRO]  57.28,20.95 0 top
FD23  FIDUCIALUFIDUCIAL  [FIDUCIAL-MICRO]  37.59,32 0 bottom
FD24  FIDUCIALUFIDUCIAL  [FIDUCIAL-MICRO]  57.28,20.95 0 bottom
FD25  FIDUCIALUFIDUCIAL  [FIDUCIAL-MICRO]  63.5,32 0 top
FD26  FIDUCIALUFIDUCIAL  [FIDUCIAL-MICRO]  83.19,20.95 0 top
FD27  FIDUCIALUFIDUCIAL  [FIDUCIAL-MICRO]  63.5,32 0 bottom
FD28  FIDUCIALUFIDUCIAL  [FIDUCIAL-MICRO]  83.19,20.95 0 bottom
FD29  FIDUCIALUFIDUCIAL  [FIDUCIAL-MICRO]  89.41,32 0 top
FD30  FIDUCIALUFIDUCIAL  [FIDUCIAL-MICRO]  109.09,20.95 0 top
FD31  FIDUCIALUFIDUCIAL  [FIDUCIAL-MICRO]  89.41,32 0 bottom
FD32  FIDUCIALUFIDUCIAL  [FIDUCIAL-MICRO]  109.09,20.95 0 bottom
FD33  FIDUCIALUFIDUCIAL  [FIDUCIAL-MICRO]  11.68,45.21 0 top
FD34  FIDUCIALUFIDUCIAL  [FIDUCIAL-MICRO]  31.37,34.16 0 top
FD35  FIDUCIALUFIDUCIAL  [FIDUCIAL-MICRO]  11.68,45.21 0 bottom
FD36  FIDUCIALUFIDUCIAL  [FIDUCIAL-MICRO]  31.37,34.16 0 bottom
FD37  FIDUCIALUFIDUCIAL  [FIDUCIAL-MICRO]  37.59,45.21 0 top
FD38  FIDUCIALUFIDUCIAL  [FIDUCIAL-MICRO]  57.28,34.16 0 top
FD39  FIDUCIALUFIDUCIAL  [FIDUCIAL-MICRO]  37.59,45.21 0 bottom
FD40  FIDUCIALUFIDUCIAL  [FIDUCIAL-MICRO]  57.28,34.16 0 bottom
FD41  FIDUCIALUFIDUCIAL  [FIDUCIAL-MICRO]  63.5,45.21 0 top
FD42  FIDUCIALUFIDUCIAL  [FIDUCIAL-MICRO]  83.19,34.16 0 top
FD43  FIDUCIALUFIDUCIAL  [FIDUCIAL-MICRO]  63.5,45.21 0 bottom
FD44  FIDUCIALUFIDUCIAL  [FIDUCIAL-MICRO]  83.19,34.16 0 bottom
FD45  FIDUCIALUFIDUCIAL  [FIDUCIAL-MICRO]  89.41,45.21 0 top
FD46  FIDUCIALUFIDUCIAL  [FIDUCIAL-MICRO]  109.09,34.16 0 top
FD47  FIDUCIALUFIDUCIAL  [FIDUCIAL-MICRO]  89.41,45.21 0 bottom
FD48  FIDUCIALUFIDUCIAL  [FIDUCIAL-MICRO]  109.09,34.16 0 bottom
FD49  FIDUCIALUFIDUCIAL  [FIDUCIAL-MICRO]  11.68,58.42 0 top
FD50  FIDUCIALUFIDUCIAL  [FIDUCIAL-MICRO]  31.37,47.37 0 top
FD51  FIDUCIALUFIDUCIAL  [FIDUCIAL-MICRO]  11.68,58.42 0 bottom
FD52  FIDUCIALUFIDUCIAL  [FIDUCIAL-MICRO]  31.37,47.37 0 bottom
FD53  FIDUCIALUFIDUCIAL  [FIDUCIAL-MICRO]  37.59,58.42 0 top
FD54  FIDUCIALUFIDUCIAL  [FIDUCIAL-MICRO]  57.28,47.37 0 top
FD55  FIDUCIALUFIDUCIAL  [FIDUCIAL-MICRO]  37.59,58.42 0 bottom
FD56  FIDUCIALUFIDUCIAL  [FIDUCIAL-MICRO]  57.28,47.37 0 bottom
FD57  FIDUCIALUFIDUCIAL  [FIDUCIAL-MICRO]  63.5,58.42 0 top
FD58  FIDUCIALUFIDUCIAL  [FIDUCIAL-MICRO]  83.19,47.37 0 top
FD59  FIDUCIALUFIDUCIAL  [FIDUCIAL-MICRO]  63.5,58.42 0 bottom
FD60  FIDUCIALUFIDUCIAL  [FIDUCIAL-MICRO]  83.19,47.37 0 bottom
FD61  FIDUCIALUFIDUCIAL  [FIDUCIAL-MICRO]  89.41,58.42 0 top
FD62  FIDUCIALUFIDUCIAL  [FIDUCIAL-MICRO]  109.09,47.37 0 top
FD63  FIDUCIALUFIDUCIAL  [FIDUCIAL-MICRO]  89.41,58.42 0 bottom
FD64  FIDUCIALUFIDUCIAL  [FIDUCIAL-MICRO]  109.09,47.37 0 bottom
FD65  FIDUCIALUFIDUCIAL  [FIDUCIAL-MICRO]  11.68,71.63 0 top
FD66  FIDUCIALUFIDUCIAL  [FIDUCIAL-MICRO]  31.37,60.58 0 top
FD67  FIDUCIALUFIDUCIAL  [FIDUCIAL-MICRO]  11.68,71.63 0 bottom
FD68  FIDUCIALUFIDUCIAL  [FIDUCIAL-MICRO]  31.37,60.58 0 bottom
FD69  FIDUCIALUFIDUCIAL  [FIDUCIAL-MICRO]  37.59,71.63 0 top
FD70  FIDUCIALUFIDUCIAL  [FIDUCIAL-MICRO]  57.28,60.58 0 top
FD71  FIDUCIALUFIDUCIAL  [FIDUCIAL-MICRO]  37.59,71.63 0 bottom
FD72  FIDUCIALUFIDUCIAL  [FIDUCIAL-MICRO]  57.28,60.58 0 bottom
FD73  FIDUCIALUFIDUCIAL  [FIDUCIAL-MICRO]  63.5,71.63 0 top
FD74  FIDUCIALUFIDUCIAL  [FIDUCIAL-MICRO]  83.19,60.58 0 top
FD75  FIDUCIALUFIDUCIAL  [FIDUCIAL-MICRO]  63.5,71.63 0 bottom
FD76  FIDUCIALUFIDUCIAL  [FIDUCIAL-MICRO]  83.19,60.58 0 bottom
FD77  FIDUCIALUFIDUCIAL  [FIDUCIAL-MICRO]  89.41,71.63 0 top
FD78  FIDUCIALUFIDUCIAL  [FIDUCIAL-MICRO]  109.09,60.58 0 top
FD79  FIDUCIALUFIDUCIAL  [FIDUCIAL-MICRO]  89.41,71.63 0 bottom
FD80  FIDUCIALUFIDUCIAL  [FIDUCIAL-MICRO]  109.09,60.58 0 bottom
FD81  FIDUCIALUFIDUCIAL  [FIDUCIAL-MICRO]  11.68,84.84 0 top
FD82  FIDUCIALUFIDUCIAL  [FIDUCIAL-MICRO]  31.37,73.79 0 top
FD83  FIDUCIALUFIDUCIAL  [FIDUCIAL-MICRO]  11.68,84.84 0 bottom
FD84  FIDUCIALUFIDUCIAL  [FIDUCIAL-MICRO]  31.37,73.79 0 bottom
FD85  FIDUCIALUFIDUCIAL  [FIDUCIAL-MICRO]  37.59,84.84 0 top
FD86  FIDUCIALUFIDUCIAL  [FIDUCIAL-MICRO]  57.28,73.79 0 top
FD87  FIDUCIALUFIDUCIAL  [FIDUCIAL-MICRO]  37.59,84.84 0 bottom
FD88  FIDUCIALUFIDUCIAL  [FIDUCIAL-MICRO]  57.28,73.79 0 bottom
FD89  FIDUCIALUFIDUCIAL  [FIDUCIAL-MICRO]  63.5,84.84 0 top
FD90  FIDUCIALUFIDUCIAL  [FIDUCIAL-MICRO]  83.19,73.79 0 top
FD91  FIDUCIALUFIDUCIAL  [FIDUCIAL-MICRO]  63.5,84.84 0 bottom
FD92  FIDUCIALUFIDUCIAL  [FIDUCIAL-MICRO]  83.19,73.79 0 bottom
FD93  FIDUCIALUFIDUCIAL  [FIDUCIAL-MICRO]  89.41,84.84 0 top
FD94  FIDUCIALUFIDUCIAL  [FIDUCIAL-MICRO]  109.09,73.79 0 top
FD95  FIDUCIALUFIDUCIAL  [FIDUCIAL-MICRO]  89.41,84.84 0 bottom
FD96  FIDUCIALUFIDUCIAL  [FIDUCIAL-MICRO]  109.09,73.79 0 bottom
FD97  FIDUCIALUFIDUCIAL  [FIDUCIAL-MICRO]  11.68,98.04 0 top
FD98  FIDUCIALUFIDUCIAL  [FIDUCIAL-MICRO]  31.37,87 0 top
FD99  FIDUCIALUFIDUCIAL  [FIDUCIAL-MICRO]  11.68,98.04 0 bottom
FD100  FIDUCIALUFIDUCIAL  [FIDUCIAL-MICRO]  31.37,87 0 bottom
FD101  FIDUCIALUFIDUCIAL  [FIDUCIAL-MICRO]  37.59,98.04 0 top
FD102  FIDUCIALUFIDUCIAL  [FIDUCIAL-MICRO]  57.28,87 0 top
FD103  FIDUCIALUFIDUCIAL  [FIDUCIAL-MICRO]  37.59,98.04 0 bottom
FD104  FIDUCIALUFIDUCIAL  [FIDUCIAL-MICRO]  57.28,87 0 bottom
FD105  FIDUCIALUFIDUCIAL  [FIDUCIAL-MICRO]  63.5,98.04 0 top
FD106  FIDUCIALUFIDUCIAL  [FIDUCIAL-MICRO]  83.19,87 0 top
FD107  FIDUCIALUFIDUCIAL  [FIDUCIAL-MICRO]  63.5,98.04 0 bottom
FD108  FIDUCIALUFIDUCIAL  [FIDUCIAL-MICRO]  83.19,87 0 bottom
FD109  FIDUCIALUFIDUCIAL  [FIDUCIAL-MICRO]  89.41,98.04 0 top
FD110  FIDUCIALUFIDUCIAL  [FIDUCIAL-MICRO]  109.09,87 0 top
FD111  FIDUCIALUFIDUCIAL  [FIDUCIAL-MICRO]  89.41,98.04 0 bottom
FD112  FIDUCIALUFIDUCIAL  [FIDUCIAL-MICRO]  109.09,87 0 bottom
FD113  FIDUCIALUFIDUCIAL  [FIDUCIAL-MICRO]  11.68,111.25 0 top
FD114  FIDUCIALUFIDUCIAL  [FIDUCIAL-MICRO]  31.37,100.2 0 top
FD115  FIDUCIALUFIDUCIAL  [FIDUCIAL-MICRO]  11.68,111.25 0 bottom
FD116  FIDUCIALUFIDUCIAL  [FIDUCIAL-MICRO]  31.37,100.2 0 bottom
FD117  FIDUCIALUFIDUCIAL  [FIDUCIAL-MICRO]  37.59,111.25 0 top
FD118  FIDUCIALUFIDUCIAL  [FIDUCIAL-MICRO]  57.28,100.2 0 top
FD119  FIDUCIALUFIDUCIAL  [FIDUCIAL-MICRO]  37.59,111.25 0 bottom
FD120  FIDUCIALUFIDUCIAL  [FIDUCIAL-MICRO]  57.28,100.2 0 bottom
FD121  FIDUCIALUFIDUCIAL  [FIDUCIAL-MICRO]  63.5,111.25 0 top
FD122  FIDUCIALUFIDUCIAL  [FIDUCIAL-MICRO]  83.19,100.2 0 top
FD123  FIDUCIALUFIDUCIAL  [FIDUCIAL-MICRO]  63.5,111.25 0 bottom
FD124  FIDUCIALUFIDUCIAL  [FIDUCIAL-MICRO]  83.19,100.2 0 bottom
FD125  FIDUCIALUFIDUCIAL  [FIDUCIAL-MICRO]  89.41,111.25 0 top
FD126  FIDUCIALUFIDUCIAL  [FIDUCIAL-MICRO]  109.09,100.2 0 top
FD127  FIDUCIALUFIDUCIAL  [FIDUCIAL-MICRO]  89.41,111.25 0 bottom
FD128  FIDUCIALUFIDUCIAL  [FIDUCIAL-MICRO]  109.09,100.2 0 bottom
FD129  FIDUCIALUFIDUCIAL  [FIDUCIAL-MICRO]  11.68,124.46 0 top
FD130  FIDUCIALUFIDUCIAL  [FIDUCIAL-MICRO]  31.37,113.41 0 top
FD131  FIDUCIALUFIDUCIAL  [FIDUCIAL-MICRO]  11.68,124.46 0 bottom
FD132  FIDUCIALUFIDUCIAL  [FIDUCIAL-MICRO]  31.37,113.41 0 bottom
FD133  FIDUCIALUFIDUCIAL  [FIDUCIAL-MICRO]  37.59,124.46 0 top
FD134  FIDUCIALUFIDUCIAL  [FIDUCIAL-MICRO]  57.28,113.41 0 top
FD135  FIDUCIALUFIDUCIAL  [FIDUCIAL-MICRO]  37.59,124.46 0 bottom
FD136  FIDUCIALUFIDUCIAL  [FIDUCIAL-MICRO]  57.28,113.41 0 bottom
FD137  FIDUCIALUFIDUCIAL  [FIDUCIAL-MICRO]  63.5,124.46 0 top
FD138  FIDUCIALUFIDUCIAL  [FIDUCIAL-MICRO]  83.19,113.41 0 top
FD139  FIDUCIALUFIDUCIAL  [FIDUCIAL-MICRO]  63.5,124.46 0 bottom
FD140  FIDUCIALUFIDUCIAL  [FIDUCIAL-MICRO]  83.19,113.41 0 bottom
FD141  FIDUCIALUFIDUCIAL  [FIDUCIAL-MICRO]  89.41,124.46 0 top
FD142  FIDUCIALUFIDUCIAL  [FIDUCIAL-MICRO]  109.09,113.41 0 top
FD143  FIDUCIALUFIDUCIAL  [FIDUCIAL-MICRO]  89.41,124.46 0 bottom
FD144  FIDUCIALUFIDUCIAL  [FIDUCIAL-MICRO]  109.09,113.41 0 bottom
FD145  FIDUCIALUFIDUCIAL  [FIDUCIAL-MICRO]  11.68,137.67 0 top
FD146  FIDUCIALUFIDUCIAL  [FIDUCIAL-MICRO]  31.37,126.62 0 top
FD147  FIDUCIALUFIDUCIAL  [FIDUCIAL-MICRO]  11.68,137.67 0 bottom
FD148  FIDUCIALUFIDUCIAL  [FIDUCIAL-MICRO]  31.37,126.62 0 bottom
FD149  FIDUCIALUFIDUCIAL  [FIDUCIAL-MICRO]  37.59,137.67 0 top
FD150  FIDUCIALUFIDUCIAL  [FIDUCIAL-MICRO]  57.28,126.62 0 top
FD151  FIDUCIALUFIDUCIAL  [FIDUCIAL-MICRO]  37.59,137.67 0 bottom
FD152  FIDUCIALUFIDUCIAL  [FIDUCIAL-MICRO]  57.28,126.62 0 bottom
FD153  FIDUCIALUFIDUCIAL  [FIDUCIAL-MICRO]  63.5,137.67 0 top
FD154  FIDUCIALUFIDUCIAL  [FIDUCIAL-MICRO]  83.19,126.62 0 top
FD155  FIDUCIALUFIDUCIAL  [FIDUCIAL-MICRO]  63.5,137.67 0 bottom
FD156  FIDUCIALUFIDUCIAL  [FIDUCIAL-MICRO]  83.19,126.62 0 bottom
FD157  FIDUCIALUFIDUCIAL  [FIDUCIAL-MICRO]  89.41,137.67 0 top
FD158  FIDUCIALUFIDUCIAL  [FIDUCIAL-MICRO]  109.09,126.62 0 top
FD159  FIDUCIALUFIDUCIAL  [FIDUCIAL-MICRO]  89.41,137.67 0 bottom
FD160  FIDUCIALUFIDUCIAL  [FIDUCIAL-MICRO]  109.09,126.62 0 bottom
FD161  FIDUCIALUFIDUCIAL  [FIDUCIAL-MICRO]  11.68,150.88 0 top
FD162  FIDUCIALUFIDUCIAL  [FIDUCIAL-MICRO]  31.37,139.83 0 top
FD163  FIDUCIALUFIDUCIAL  [FIDUCIAL-MICRO]  11.68,150.88 0 bottom
FD164  FIDUCIALUFIDUCIAL  [FIDUCIAL-MICRO]  31.37,139.83 0 bottom
FD165  FIDUCIALUFIDUCIAL  [FIDUCIAL-MICRO]  37.59,150.88 0 top
FD166  FIDUCIALUFIDUCIAL  [FIDUCIAL-MICRO]  57.28,139.83 0 top
FD167  FIDUCIALUFIDUCIAL  [FIDUCIAL-MICRO]  37.59,150.88 0 bottom
FD168  FIDUCIALUFIDUCIAL  [FIDUCIAL-MICRO]  57.28,139.83 0 bottom
FD169  FIDUCIALUFIDUCIAL  [FIDUCIAL-MICRO]  63.5,150.88 0 top
FD170  FIDUCIALUFIDUCIAL  [FIDUCIAL-MICRO]  83.19,139.83 0 top
FD171  FIDUCIALUFIDUCIAL  [FIDUCIAL-MICRO]  63.5,150.88 0 bottom
FD172  FIDUCIALUFIDUCIAL  [FIDUCIAL-MICRO]  83.19,139.83 0 bottom
FD173  FIDUCIALUFIDUCIAL  [FIDUCIAL-MICRO]  89.41,150.88 0 top
FD174  FIDUCIALUFIDUCIAL  [FIDUCIAL-MICRO]  109.09,139.83 0 top
FD175  FIDUCIALUFIDUCIAL  [FIDUCIAL-MICRO]  89.41,150.88 0 bottom
FD176  FIDUCIALUFIDUCIAL  [FIDUCIAL-MICRO]  109.09,139.83 0 bottom
FD177  FIDUCIALUFIDUCIAL  [FIDUCIAL-MICRO]  11.68,164.08 0 top
FD178  FIDUCIALUFIDUCIAL  [FIDUCIAL-MICRO]  31.37,153.03 0 top
FD179  FIDUCIALUFIDUCIAL  [FIDUCIAL-MICRO]  11.68,164.08 0 bottom
FD180  FIDUCIALUFIDUCIAL  [FIDUCIAL-MICRO]  31.37,153.03 0 bottom
FD181  FIDUCIALUFIDUCIAL  [FIDUCIAL-MICRO]  37.59,164.08 0 top
FD182  FIDUCIALUFIDUCIAL  [FIDUCIAL-MICRO]  57.28,153.03 0 top
FD183  FIDUCIALUFIDUCIAL  [FIDUCIAL-MICRO]  37.59,164.08 0 bottom
FD184  FIDUCIALUFIDUCIAL  [FIDUCIAL-MICRO]  57.28,153.03 0 bottom
FD185  FIDUCIALUFIDUCIAL  [FIDUCIAL-MICRO]  63.5,164.08 0 top
FD186  FIDUCIALUFIDUCIAL  [FIDUCIAL-MICRO]  83.19,153.03 0 top
FD187  FIDUCIALUFIDUCIAL  [FIDUCIAL-MICRO]  63.5,164.08 0 bottom
FD188  FIDUCIALUFIDUCIAL  [FIDUCIAL-MICRO]  83.19,153.03 0 bottom
FD189  FIDUCIALUFIDUCIAL  [FIDUCIAL-MICRO]  89.41,164.08 0 top
FD190  FIDUCIALUFIDUCIAL  [FIDUCIAL-MICRO]  109.09,153.03 0 top
FD191  FIDUCIALUFIDUCIAL  [FIDUCIAL-MICRO]  89.41,164.08 0 bottom
FD192  FIDUCIALUFIDUCIAL  [FIDUCIAL-MICRO]  109.09,153.03 0 bottom
H1  STAND-OFFTIGHT  [STAND-OFF-TIGHT]  9.4,9.4 0 top
H2  STAND-OFFTIGHT  [STAND-OFF-TIGHT]  29.72,9.4 0 top
H3  STAND-OFFTIGHT  [STAND-OFF-TIGHT]  35.31,9.4 0 top
H4  STAND-OFFTIGHT  [STAND-OFF-TIGHT]  55.63,9.4 0 top
H5  STAND-OFFTIGHT  [STAND-OFF-TIGHT]  61.21,9.4 0 top
H6  STAND-OFFTIGHT  [STAND-OFF-TIGHT]  81.53,9.4 0 top
H7  STAND-OFFTIGHT  [STAND-OFF-TIGHT]  87.12,9.4 0 top
H8  STAND-OFFTIGHT  [STAND-OFF-TIGHT]  107.44,9.4 0 top
H9  STAND-OFFTIGHT  [STAND-OFF-TIGHT]  9.4,22.61 0 top
H10  STAND-OFFTIGHT  [STAND-OFF-TIGHT]  29.72,22.61 0 top
H11  STAND-OFFTIGHT  [STAND-OFF-TIGHT]  35.31,22.61 0 top
H12  STAND-OFFTIGHT  [STAND-OFF-TIGHT]  55.63,22.61 0 top
H13  STAND-OFFTIGHT  [STAND-OFF-TIGHT]  61.21,22.61 0 top
H14  STAND-OFFTIGHT  [STAND-OFF-TIGHT]  81.53,22.61 0 top
H15  STAND-OFFTIGHT  [STAND-OFF-TIGHT]  87.12,22.61 0 top
H16  STAND-OFFTIGHT  [STAND-OFF-TIGHT]  107.44,22.61 0 top
H17  STAND-OFFTIGHT  [STAND-OFF-TIGHT]  9.4,35.81 0 top
H18  STAND-OFFTIGHT  [STAND-OFF-TIGHT]  29.72,35.81 0 top
H19  STAND-OFFTIGHT  [STAND-OFF-TIGHT]  35.31,35.81 0 top
H20  STAND-OFFTIGHT  [STAND-OFF-TIGHT]  55.63,35.81 0 top
H21  STAND-OFFTIGHT  [STAND-OFF-TIGHT]  61.21,35.81 0 top
H22  STAND-OFFTIGHT  [STAND-OFF-TIGHT]  81.53,35.81 0 top
H23  STAND-OFFTIGHT  [STAND-OFF-TIGHT]  87.12,35.81 0 top
H24  STAND-OFFTIGHT  [STAND-OFF-TIGHT]  107.44,35.81 0 top
H25  STAND-OFFTIGHT  [STAND-OFF-TIGHT]  9.4,49.02 0 top
H26  STAND-OFFTIGHT  [STAND-OFF-TIGHT]  29.72,49.02 0 top
H27  STAND-OFFTIGHT  [STAND-OFF-TIGHT]  35.31,49.02 0 top
H28  STAND-OFFTIGHT  [STAND-OFF-TIGHT]  55.63,49.02 0 top
H29  STAND-OFFTIGHT  [STAND-OFF-TIGHT]  61.21,49.02 0 top
H30  STAND-OFFTIGHT  [STAND-OFF-TIGHT]  81.53,49.02 0 top
H31  STAND-OFFTIGHT  [STAND-OFF-TIGHT]  87.12,49.02 0 top
H32  STAND-OFFTIGHT  [STAND-OFF-TIGHT]  107.44,49.02 0 top
H33  STAND-OFFTIGHT  [STAND-OFF-TIGHT]  9.4,62.23 0 top
H34  STAND-OFFTIGHT  [STAND-OFF-TIGHT]  29.72,62.23 0 top
H35  STAND-OFFTIGHT  [STAND-OFF-TIGHT]  35.31,62.23 0 top
H36  STAND-OFFTIGHT  [STAND-OFF-TIGHT]  55.63,62.23 0 top
H37  STAND-OFFTIGHT  [STAND-OFF-TIGHT]  61.21,62.23 0 top
H38  STAND-OFFTIGHT  [STAND-OFF-TIGHT]  81.53,62.23 0 top
H39  STAND-OFFTIGHT  [STAND-OFF-TIGHT]  87.12,62.23 0 top
H40  STAND-OFFTIGHT  [STAND-OFF-TIGHT]  107.44,62.23 0 top
H41  STAND-OFFTIGHT  [STAND-OFF-TIGHT]  9.4,75.44 0 top
H42  STAND-OFFTIGHT  [STAND-OFF-TIGHT]  29.72,75.44 0 top
H43  STAND-OFFTIGHT  [STAND-OFF-TIGHT]  35.31,75.44 0 top
H44  STAND-OFFTIGHT  [STAND-OFF-TIGHT]  55.63,75.44 0 top
H45  STAND-OFFTIGHT  [STAND-OFF-TIGHT]  61.21,75.44 0 top
H46  STAND-OFFTIGHT  [STAND-OFF-TIGHT]  81.53,75.44 0 top
H47  STAND-OFFTIGHT  [STAND-OFF-TIGHT]  87.12,75.44 0 top
H48  STAND-OFFTIGHT  [STAND-OFF-TIGHT]  107.44,75.44 0 top
H49  STAND-OFFTIGHT  [STAND-OFF-TIGHT]  9.4,88.65 0 top
H50  STAND-OFFTIGHT  [STAND-OFF-TIGHT]  29.72,88.65 0 top
H51  STAND-OFFTIGHT  [STAND-OFF-TIGHT]  35.31,88.65 0 top
H52  STAND-OFFTIGHT  [STAND-OFF-TIGHT]  55.63,88.65 0 top
H53  STAND-OFFTIGHT  [STAND-OFF-TIGHT]  61.21,88.65 0 top
H54  STAND-OFFTIGHT  [STAND-OFF-TIGHT]  81.53,88.65 0 top
H55  STAND-OFFTIGHT  [STAND-OFF-TIGHT]  87.12,88.65 0 top
H56  STAND-OFFTIGHT  [STAND-OFF-TIGHT]  107.44,88.65 0 top
H57  STAND-OFFTIGHT  [STAND-OFF-TIGHT]  9.4,101.85 0 top
H58  STAND-OFFTIGHT  [STAND-OFF-TIGHT]  29.72,101.85 0 top
H59  STAND-OFFTIGHT  [STAND-OFF-TIGHT]  35.31,101.85 0 top
H60  STAND-OFFTIGHT  [STAND-OFF-TIGHT]  55.63,101.85 0 top
H61  STAND-OFFTIGHT  [STAND-OFF-TIGHT]  61.21,101.85 0 top
H62  STAND-OFFTIGHT  [STAND-OFF-TIGHT]  81.53,101.85 0 top
H63  STAND-OFFTIGHT  [STAND-OFF-TIGHT]  87.12,101.85 0 top
H64  STAND-OFFTIGHT  [STAND-OFF-TIGHT]  107.44,101.85 0 top
H65  STAND-OFFTIGHT  [STAND-OFF-TIGHT]  9.4,115.06 0 top
H66  STAND-OFFTIGHT  [STAND-OFF-TIGHT]  29.72,115.06 0 top
H67  STAND-OFFTIGHT  [STAND-OFF-TIGHT]  35.31,115.06 0 top
H68  STAND-OFFTIGHT  [STAND-OFF-TIGHT]  55.63,115.06 0 top
H69  STAND-OFFTIGHT  [STAND-OFF-TIGHT]  61.21,115.06 0 top
H70  STAND-OFFTIGHT  [STAND-OFF-TIGHT]  81.53,115.06 0 top
H71  STAND-OFFTIGHT  [STAND-OFF-TIGHT]  87.12,115.06 0 top
H72  STAND-OFFTIGHT  [STAND-OFF-TIGHT]  107.44,115.06 0 top
H73  STAND-OFFTIGHT  [STAND-OFF-TIGHT]  9.4,128.27 0 top
H74  STAND-OFFTIGHT  [STAND-OFF-TIGHT]  29.72,128.27 0 top
H75  STAND-OFFTIGHT  [STAND-OFF-TIGHT]  35.31,128.27 0 top
H76  STAND-OFFTIGHT  [STAND-OFF-TIGHT]  55.63,128.27 0 top
H77  STAND-OFFTIGHT  [STAND-OFF-TIGHT]  61.21,128.27 0 top
H78  STAND-OFFTIGHT  [STAND-OFF-TIGHT]  81.53,128.27 0 top
H79  STAND-OFFTIGHT  [STAND-OFF-TIGHT]  87.12,128.27 0 top
H80  STAND-OFFTIGHT  [STAND-OFF-TIGHT]  107.44,128.27 0 top
H81  STAND-OFFTIGHT  [STAND-OFF-TIGHT]  9.4,141.48 0 top
H82  STAND-OFFTIGHT  [STAND-OFF-TIGHT]  29.72,141.48 0 top
H83  STAND-OFFTIGHT  [STAND-OFF-TIGHT]  35.31,141.48 0 top
H84  STAND-OFFTIGHT  [STAND-OFF-TIGHT]  55.63,141.48 0 top
H85  STAND-OFFTIGHT  [STAND-OFF-TIGHT]  61.21,141.48 0 top
H86  STAND-OFFTIGHT  [STAND-OFF-TIGHT]  81.53,141.48 0 top
H87  STAND-OFFTIGHT  [STAND-OFF-TIGHT]  87.12,141.48 0 top
H88  STAND-OFFTIGHT  [STAND-OFF-TIGHT]  107.44,141.48 0 top
H89  STAND-OFFTIGHT  [STAND-OFF-TIGHT]  9.4,154.69 0 top
H90  STAND-OFFTIGHT  [STAND-OFF-TIGHT]  29.72,154.69 0 top
H91  STAND-OFFTIGHT  [STAND-OFF-TIGHT]  35.31,154.69 0 top
H92  STAND-OFFTIGHT  [STAND-OFF-TIGHT]  55.63,154.69 0 top
H93  STAND-OFFTIGHT  [STAND-OFF-TIGHT]  61.21,154.69 0 top
H94  STAND-OFFTIGHT  [STAND-OFF-TIGHT]  81.53,154.69 0 top
H95  STAND-OFFTIGHT  [STAND-OFF-TIGHT]  87.12,154.69 0 top
H96  STAND-OFFTIGHT  [STAND-OFF-TIGHT]  107.44,154.69 0 top
I2C  JUMPER-SMT_3_2-NC_TRACE_SILK  [SMT-JUMPER_3_2-NC_TRACE_SILK]  14.48,12.7 180 top
I2C1  JUMPER-SMT_3_2-NC_TRACE_SILK  [SMT-JUMPER_3_2-NC_TRACE_SILK]  40.39,12.7 180 top
I2C2  JUMPER-SMT_3_2-NC_TRACE_SILK  [SMT-JUMPER_3_2-NC_TRACE_SILK]  66.29,12.7 180 top
I2C3  JUMPER-SMT_3_2-NC_TRACE_SILK  [SMT-JUMPER_3_2-NC_TRACE_SILK]  92.2,12.7 180 top
I2C4  JUMPER-SMT_3_2-NC_TRACE_SILK  [SMT-JUMPER_3_2-NC_TRACE_SILK]  14.48,25.91 180 top
I2C5  JUMPER-SMT_3_2-NC_TRACE_SILK  [SMT-JUMPER_3_2-NC_TRACE_SILK]  40.39,25.91 180 top
I2C6  JUMPER-SMT_3_2-NC_TRACE_SILK  [SMT-JUMPER_3_2-NC_TRACE_SILK]  66.29,25.91 180 top
I2C7  JUMPER-SMT_3_2-NC_TRACE_SILK  [SMT-JUMPER_3_2-NC_TRACE_SILK]  92.2,25.91 180 top
I2C8  JUMPER-SMT_3_2-NC_TRACE_SILK  [SMT-JUMPER_3_2-NC_TRACE_SILK]  14.48,39.12 180 top
I2C9  JUMPER-SMT_3_2-NC_TRACE_SILK  [SMT-JUMPER_3_2-NC_TRACE_SILK]  40.39,39.12 180 top
I2C10  JUMPER-SMT_3_2-NC_TRACE_SILK  [SMT-JUMPER_3_2-NC_TRACE_SILK]  66.29,39.12 180 top
I2C11  JUMPER-SMT_3_2-NC_TRACE_SILK  [SMT-JUMPER_3_2-NC_TRACE_SILK]  92.2,39.12 180 top
I2C12  JUMPER-SMT_3_2-NC_TRACE_SILK  [SMT-JUMPER_3_2-NC_TRACE_SILK]  14.48,52.32 180 top
I2C13  JUMPER-SMT_3_2-NC_TRACE_SILK  [SMT-JUMPER_3_2-NC_TRACE_SILK]  40.39,52.32 180 top
I2C14  JUMPER-SMT_3_2-NC_TRACE_SILK  [SMT-JUMPER_3_2-NC_TRACE_SILK]  66.29,52.32 180 top
I2C15  JUMPER-SMT_3_2-NC_TRACE_SILK  [SMT-JUMPER_3_2-NC_TRACE_SILK]  92.2,52.32 180 top
I2C16  JUMPER-SMT_3_2-NC_TRACE_SILK  [SMT-JUMPER_3_2-NC_TRACE_SILK]  14.48,65.53 180 top
I2C17  JUMPER-SMT_3_2-NC_TRACE_SILK  [SMT-JUMPER_3_2-NC_TRACE_SILK]  40.39,65.53 180 top
I2C18  JUMPER-SMT_3_2-NC_TRACE_SILK  [SMT-JUMPER_3_2-NC_TRACE_SILK]  66.29,65.53 180 top
I2C19  JUMPER-SMT_3_2-NC_TRACE_SILK  [SMT-JUMPER_3_2-NC_TRACE_SILK]  92.2,65.53 180 top
I2C20  JUMPER-SMT_3_2-NC_TRACE_SILK  [SMT-JUMPER_3_2-NC_TRACE_SILK]  14.48,78.74 180 top
I2C21  JUMPER-SMT_3_2-NC_TRACE_SILK  [SMT-JUMPER_3_2-NC_TRACE_SILK]  40.39,78.74 180 top
I2C22  JUMPER-SMT_3_2-NC_TRACE_SILK  [SMT-JUMPER_3_2-NC_TRACE_SILK]  66.29,78.74 180 top
I2C23  JUMPER-SMT_3_2-NC_TRACE_SILK  [SMT-JUMPER_3_2-NC_TRACE_SILK]  92.2,78.74 180 top
I2C24  JUMPER-SMT_3_2-NC_TRACE_SILK  [SMT-JUMPER_3_2-NC_TRACE_SILK]  14.48,91.95 180 top
I2C25  JUMPER-SMT_3_2-NC_TRACE_SILK  [SMT-JUMPER_3_2-NC_TRACE_SILK]  40.39,91.95 180 top
I2C26  JUMPER-SMT_3_2-NC_TRACE_SILK  [SMT-JUMPER_3_2-NC_TRACE_SILK]  66.29,91.95 180 top
I2C27  JUMPER-SMT_3_2-NC_TRACE_SILK  [SMT-JUMPER_3_2-NC_TRACE_SILK]  92.2,91.95 180 top
I2C28  JUMPER-SMT_3_2-NC_TRACE_SILK  [SMT-JUMPER_3_2-NC_TRACE_SILK]  14.48,105.16 180 top
I2C29  JUMPER-SMT_3_2-NC_TRACE_SILK  [SMT-JUMPER_3_2-NC_TRACE_SILK]  40.39,105.16 180 top
I2C30  JUMPER-SMT_3_2-NC_TRACE_SILK  [SMT-JUMPER_3_2-NC_TRACE_SILK]  66.29,105.16 180 top
I2C31  JUMPER-SMT_3_2-NC_TRACE_SILK  [SMT-JUMPER_3_2-NC_TRACE_SILK]  92.2,105.16 180 top
I2C32  JUMPER-SMT_3_2-NC_TRACE_SILK  [SMT-JUMPER_3_2-NC_TRACE_SILK]  14.48,118.36 180 top
I2C33  JUMPER-SMT_3_2-NC_TRACE_SILK  [SMT-JUMPER_3_2-NC_TRACE_SILK]  40.39,118.36 180 top
I2C34  JUMPER-SMT_3_2-NC_TRACE_SILK  [SMT-JUMPER_3_2-NC_TRACE_SILK]  66.29,118.36 180 top
I2C35  JUMPER-SMT_3_2-NC_TRACE_SILK  [SMT-JUMPER_3_2-NC_TRACE_SILK]  92.2,118.36 180 top
I2C36  JUMPER-SMT_3_2-NC_TRACE_SILK  [SMT-JUMPER_3_2-NC_TRACE_SILK]  14.48,131.57 180 top
I2C37  JUMPER-SMT_3_2-NC_TRACE_SILK  [SMT-JUMPER_3_2-NC_TRACE_SILK]  40.39,131.57 180 top
I2C38  JUMPER-SMT_3_2-NC_TRACE_SILK  [SMT-JUMPER_3_2-NC_TRACE_SILK]  66.29,131.57 180 top
I2C39  JUMPER-SMT_3_2-NC_TRACE_SILK  [SMT-JUMPER_3_2-NC_TRACE_SILK]  92.2,131.57 180 top
I2C40  JUMPER-SMT_3_2-NC_TRACE_SILK  [SMT-JUMPER_3_2-NC_TRACE_SILK]  14.48,144.78 180 top
I2C41  JUMPER-SMT_3_2-NC_TRACE_SILK  [SMT-JUMPER_3_2-NC_TRACE_SILK]  40.39,144.78 180 top
I2C42  JUMPER-SMT_3_2-NC_TRACE_SILK  [SMT-JUMPER_3_2-NC_TRACE_SILK]  66.29,144.78 180 top
I2C43  JUMPER-SMT_3_2-NC_TRACE_SILK  [SMT-JUMPER_3_2-NC_TRACE_SILK]  92.2,144.78 180 top
I2C44  JUMPER-SMT_3_2-NC_TRACE_SILK  [SMT-JUMPER_3_2-NC_TRACE_SILK]  14.48,157.99 180 top
I2C45  JUMPER-SMT_3_2-NC_TRACE_SILK  [SMT-JUMPER_3_2-NC_TRACE_SILK]  40.39,157.99 180 top
I2C46  JUMPER-SMT_3_2-NC_TRACE_SILK  [SMT-JUMPER_3_2-NC_TRACE_SILK]  66.29,157.99 180 top
I2C47  JUMPER-SMT_3_2-NC_TRACE_SILK  [SMT-JUMPER_3_2-NC_TRACE_SILK]  92.2,157.99 180 top
J1  Qwiic Vert  [JST04_1MM_VERT]  27.69,15.75 270 top
J2  Qwiic Vert  [JST04_1MM_VERT]  11.43,15.75 90 top
J3  [1X06_NO_SILK]  25.91,8.13 180 top
J4  Qwiic Vert  [JST04_1MM_VERT]  53.59,15.75 270 top
J5  Qwiic Vert  [JST04_1MM_VERT]  37.34,15.75 90 top
J6  [1X06_NO_SILK]  51.82,8.13 180 top
J7  Qwiic Vert  [JST04_1MM_VERT]  79.5,15.75 270 top
J8  Qwiic Vert  [JST04_1MM_VERT]  63.25,15.75 90 top
J9  [1X06_NO_SILK]  77.72,8.13 180 top
J10  Qwiic Vert  [JST04_1MM_VERT]  105.41,15.75 270 top
J11  Qwiic Vert  [JST04_1MM_VERT]  89.15,15.75 90 top
J12  [1X06_NO_SILK]  103.63,8.13 180 top
J13  Qwiic Vert  [JST04_1MM_VERT]  27.69,28.96 270 top
J14  Qwiic Vert  [JST04_1MM_VERT]  11.43,28.96 90 top
J15  [1X06_NO_SILK]  25.91,21.34 180 top
J16  Qwiic Vert  [JST04_1MM_VERT]  53.59,28.96 270 top
J17  Qwiic Vert  [JST04_1MM_VERT]  37.34,28.96 90 top
J18  [1X06_NO_SILK]  51.82,21.34 180 top
J19  Qwiic Vert  [JST04_1MM_VERT]  79.5,28.96 270 top
J20  Qwiic Vert  [JST04_1MM_VERT]  63.25,28.96 90 top
J21  [1X06_NO_SILK]  77.72,21.34 180 top
J22  Qwiic Vert  [JST04_1MM_VERT]  105.41,28.96 270 top
J23  Qwiic Vert  [JST04_1MM_VERT]  89.15,28.96 90 top
J24  [1X06_NO_SILK]  103.63,21.34 180 top
J25  Qwiic Vert  [JST04_1MM_VERT]  27.69,42.16 270 top
J26  Qwiic Vert  [JST04_1MM_VERT]  11.43,42.16 90 top
J27  [1X06_NO_SILK]  25.91,34.54 180 top
J28  Qwiic Vert  [JST04_1MM_VERT]  53.59,42.16 270 top
J29  Qwiic Vert  [JST04_1MM_VERT]  37.34,42.16 90 top
J30  [1X06_NO_SILK]  51.82,34.54 180 top
J31  Qwiic Vert  [JST04_1MM_VERT]  79.5,42.16 270 top
J32  Qwiic Vert  [JST04_1MM_VERT]  63.25,42.16 90 top
J33  [1X06_NO_SILK]  77.72,34.54 180 top
J34  Qwiic Vert  [JST04_1MM_VERT]  105.41,42.16 270 top
J35  Qwiic Vert  [JST04_1MM_VERT]  89.15,42.16 90 top
J36  [1X06_NO_SILK]  103.63,34.54 180 top
J37  Qwiic Vert  [JST04_1MM_VERT]  27.69,55.37 270 top
J38  Qwiic Vert  [JST04_1MM_VERT]  11.43,55.37 90 top
J39  [1X06_NO_SILK]  25.91,47.75 180 top
J40  Qwiic Vert  [JST04_1MM_VERT]  53.59,55.37 270 top
J41  Qwiic Vert  [JST04_1MM_VERT]  37.34,55.37 90 top
J42  [1X06_NO_SILK]  51.82,47.75 180 top
J43  Qwiic Vert  [JST04_1MM_VERT]  79.5,55.37 270 top
J44  Qwiic Vert  [JST04_1MM_VERT]  63.25,55.37 90 top
J45  [1X06_NO_SILK]  77.72,47.75 180 top
J46  Qwiic Vert  [JST04_1MM_VERT]  105.41,55.37 270 top
J47  Qwiic Vert  [JST04_1MM_VERT]  89.15,55.37 90 top
J48  [1X06_NO_SILK]  103.63,47.75 180 top
J49  Qwiic Vert  [JST04_1MM_VERT]  27.69,68.58 270 top
J50  Qwiic Vert  [JST04_1MM_VERT]  11.43,68.58 90 top
J51  [1X06_NO_SILK]  25.91,60.96 180 top
J52  Qwiic Vert  [JST04_1MM_VERT]  53.59,68.58 270 top
J53  Qwiic Vert  [JST04_1MM_VERT]  37.34,68.58 90 top
J54  [1X06_NO_SILK]  51.82,60.96 180 top
J55  Qwiic Vert  [JST04_1MM_VERT]  79.5,68.58 270 top
J56  Qwiic Vert  [JST04_1MM_VERT]  63.25,68.58 90 top
J57  [1X06_NO_SILK]  77.72,60.96 180 top
J58  Qwiic Vert  [JST04_1MM_VERT]  105.41,68.58 270 top
J59  Qwiic Vert  [JST04_1MM_VERT]  89.15,68.58 90 top
J60  [1X06_NO_SILK]  103.63,60.96 180 top
J61  Qwiic Vert  [JST04_1MM_VERT]  27.69,81.79 270 top
J62  Qwiic Vert  [JST04_1MM_VERT]  11.43,81.79 90 top
J63  [1X06_NO_SILK]  25.91,74.17 180 top
J64  Qwiic Vert  [JST04_1MM_VERT]  53.59,81.79 270 top
J65  Qwiic Vert  [JST04_1MM_VERT]  37.34,81.79 90 top
J66  [1X06_NO_SILK]  51.82,74.17 180 top
J67  Qwiic Vert  [JST04_1MM_VERT]  79.5,81.79 270 top
J68  Qwiic Vert  [JST04_1MM_VERT]  63.25,81.79 90 top
J69  [1X06_NO_SILK]  77.72,74.17 180 top
J70  Qwiic Vert  [JST04_1MM_VERT]  105.41,81.79 270 top
J71  Qwiic Vert  [JST04_1MM_VERT]  89.15,81.79 90 top
J72  [1X06_NO_SILK]  103.63,74.17 180 top
J73  Qwiic Vert  [JST04_1MM_VERT]  27.69,95 270 top
J74  Qwiic Vert  [JST04_1MM_VERT]  11.43,95 90 top
J75  [1X06_NO_SILK]  25.91,87.38 180 top
J76  Qwiic Vert  [JST04_1MM_VERT]  53.59,95 270 top
J77  Qwiic Vert  [JST04_1MM_VERT]  37.34,95 90 top
J78  [1X06_NO_SILK]  51.82,87.38 180 top
J79  Qwiic Vert  [JST04_1MM_VERT]  79.5,95 270 top
J80  Qwiic Vert  [JST04_1MM_VERT]  63.25,95 90 top
J81  [1X06_NO_SILK]  77.72,87.38 180 top
J82  Qwiic Vert  [JST04_1MM_VERT]  105.41,95 270 top
J83  Qwiic Vert  [JST04_1MM_VERT]  89.15,95 90 top
J84  [1X06_NO_SILK]  103.63,87.38 180 top
J85  Qwiic Vert  [JST04_1MM_VERT]  27.69,108.2 270 top
J86  Qwiic Vert  [JST04_1MM_VERT]  11.43,108.2 90 top
J87  [1X06_NO_SILK]  25.91,100.58 180 top
J88  Qwiic Vert  [JST04_1MM_VERT]  53.59,108.2 270 top
J89  Qwiic Vert  [JST04_1MM_VERT]  37.34,108.2 90 top
J90  [1X06_NO_SILK]  51.82,100.58 180 top
J91  Qwiic Vert  [JST04_1MM_VERT]  79.5,108.2 270 top
J92  Qwiic Vert  [JST04_1MM_VERT]  63.25,108.2 90 top
J93  [1X06_NO_SILK]  77.72,100.58 180 top
J94  Qwiic Vert  [JST04_1MM_VERT]  105.41,108.2 270 top
J95  Qwiic Vert  [JST04_1MM_VERT]  89.15,108.2 90 top
J96  [1X06_NO_SILK]  103.63,100.58 180 top
J97  Qwiic Vert  [JST04_1MM_VERT]  27.69,121.41 270 top
J98  Qwiic Vert  [JST04_1MM_VERT]  11.43,121.41 90 top
J99  [1X06_NO_SILK]  25.91,113.79 180 top
J100  Qwiic Vert  [JST04_1MM_VERT]  53.59,121.41 270 top
J101  Qwiic Vert  [JST04_1MM_VERT]  37.34,121.41 90 top
J102  [1X06_NO_SILK]  51.82,113.79 180 top
J103  Qwiic Vert  [JST04_1MM_VERT]  79.5,121.41 270 top
J104  Qwiic Vert  [JST04_1MM_VERT]  63.25,121.41 90 top
J105  [1X06_NO_SILK]  77.72,113.79 180 top
J106  Qwiic Vert  [JST04_1MM_VERT]  105.41,121.41 270 top
J107  Qwiic Vert  [JST04_1MM_VERT]  89.15,121.41 90 top
J108  [1X06_NO_SILK]  103.63,113.79 180 top
J109  Qwiic Vert  [JST04_1MM_VERT]  27.69,134.62 270 top
J110  Qwiic Vert  [JST04_1MM_VERT]  11.43,134.62 90 top
J111  [1X06_NO_SILK]  25.91,127 180 top
J112  Qwiic Vert  [JST04_1MM_VERT]  53.59,134.62 270 top
J113  Qwiic Vert  [JST04_1MM_VERT]  37.34,134.62 90 top
J114  [1X06_NO_SILK]  51.82,127 180 top
J115  Qwiic Vert  [JST04_1MM_VERT]  79.5,134.62 270 top
J116  Qwiic Vert  [JST04_1MM_VERT]  63.25,134.62 90 top
J117  [1X06_NO_SILK]  77.72,127 180 top
J118  Qwiic Vert  [JST04_1MM_VERT]  105.41,134.62 270 top
J119  Qwiic Vert  [JST04_1MM_VERT]  89.15,134.62 90 top
J120  [1X06_NO_SILK]  103.63,127 180 top
J121  Qwiic Vert  [JST04_1MM_VERT]  27.69,147.83 270 top
J122  Qwiic Vert  [JST04_1MM_VERT]  11.43,147.83 90 top
J123  [1X06_NO_SILK]  25.91,140.21 180 top
J124  Qwiic Vert  [JST04_1MM_VERT]  53.59,147.83 270 top
J125  Qwiic Vert  [JST04_1MM_VERT]  37.34,147.83 90 top
J126  [1X06_NO_SILK]  51.82,140.21 180 top
J127  Qwiic Vert  [JST04_1MM_VERT]  79.5,147.83 270 top
J128  Qwiic Vert  [JST04_1MM_VERT]  63.25,147.83 90 top
J129  [1X06_NO_SILK]  77.72,140.21 180 top
J130  Qwiic Vert  [JST04_1MM_VERT]  105.41,147.83 270 top
J131  Qwiic Vert  [JST04_1MM_VERT]  89.15,147.83 90 top
J132  [1X06_NO_SILK]  103.63,140.21 180 top
J133  Qwiic Vert  [JST04_1MM_VERT]  27.69,161.04 270 top
J134  Qwiic Vert  [JST04_1MM_VERT]  11.43,161.04 90 top
J135  [1X06_NO_SILK]  25.91,153.42 180 top
J136  Qwiic Vert  [JST04_1MM_VERT]  53.59,161.04 270 top
J137  Qwiic Vert  [JST04_1MM_VERT]  37.34,161.04 90 top
J138  [1X06_NO_SILK]  51.82,153.42 180 top
J139  Qwiic Vert  [JST04_1MM_VERT]  79.5,161.04 270 top
J140  Qwiic Vert  [JST04_1MM_VERT]  63.25,161.04 90 top
J141  [1X06_NO_SILK]  77.72,153.42 180 top
J142  Qwiic Vert  [JST04_1MM_VERT]  105.41,161.04 270 top
J143  Qwiic Vert  [JST04_1MM_VERT]  89.15,161.04 90 top
J144  [1X06_NO_SILK]  103.63,153.42 180 top
LOGO1  SFE_LOGO_NAME.1_INCH  [SFE_LOGO_NAME_.1]  19.56,13.21 0 bottom
LOGO2  QWIIC_LOGO_CONNECTOR  [QWIIC_5.5MM]  10.67,16.26 0 bottom
LOGO3  OSHW-LOGOMINI  [OSHW-LOGO-MINI]  29.72,16.26 0 bottom
LOGO4  SFE_LOGO_FLAME.1_INCH  [SFE_LOGO_FLAME_.1]  26.16,10.67 0 top
LOGO5  SFE_LOGO_NAME.1_INCH  [SFE_LOGO_NAME_.1]  45.47,13.21 0 bottom
LOGO6  QWIIC_LOGO_CONNECTOR  [QWIIC_5.5MM]  36.58,16.26 0 bottom
LOGO7  OSHW-LOGOMINI  [OSHW-LOGO-MINI]  55.63,16.26 0 bottom
LOGO8  SFE_LOGO_FLAME.1_INCH  [SFE_LOGO_FLAME_.1]  52.07,10.67 0 top
LOGO9  SFE_LOGO_NAME.1_INCH  [SFE_LOGO_NAME_.1]  71.37,13.21 0 bottom
LOGO10  QWIIC_LOGO_CONNECTOR  [QWIIC_5.5MM]  62.48,16.26 0 bottom
LOGO11  OSHW-LOGOMINI  [OSHW-LOGO-MINI]  81.53,16.26 0 bottom
LOGO12  SFE_LOGO_FLAME.1_INCH  [SFE_LOGO_FLAME_.1]  77.98,10.67 0 top
LOGO13  SFE_LOGO_NAME.1_INCH  [SFE_LOGO_NAME_.1]  97.28,13.21 0 bottom
LOGO14  QWIIC_LOGO_CONNECTOR  [QWIIC_5.5MM]  88.39,16.26 0 bottom
LOGO15  OSHW-LOGOMINI  [OSHW-LOGO-MINI]  107.44,16.26 0 bottom
LOGO16  SFE_LOGO_FLAME.1_INCH  [SFE_LOGO_FLAME_.1]  103.89,10.67 0 top
LOGO17  SFE_LOGO_NAME.1_INCH  [SFE_LOGO_NAME_.1]  19.56,26.42 0 bottom
LOGO18  QWIIC_LOGO_CONNECTOR  [QWIIC_5.5MM]  10.67,29.46 0 bottom
LOGO19  OSHW-LOGOMINI  [OSHW-LOGO-MINI]  29.72,29.46 0 bottom
LOGO20  SFE_LOGO_FLAME.1_INCH  [SFE_LOGO_FLAME_.1]  26.16,23.88 0 top
LOGO21  SFE_LOGO_NAME.1_INCH  [SFE_LOGO_NAME_.1]  45.47,26.42 0 bottom
LOGO22  QWIIC_LOGO_CONNECTOR  [QWIIC_5.5MM]  36.58,29.46 0 bottom
LOGO23  OSHW-LOGOMINI  [OSHW-LOGO-MINI]  55.63,29.46 0 bottom
LOGO24  SFE_LOGO_FLAME.1_INCH  [SFE_LOGO_FLAME_.1]  52.07,23.88 0 top
LOGO25  SFE_LOGO_NAME.1_INCH  [SFE_LOGO_NAME_.1]  71.37,26.42 0 bottom
LOGO26  QWIIC_LOGO_CONNECTOR  [QWIIC_5.5MM]  62.48,29.46 0 bottom
LOGO27  OSHW-LOGOMINI  [OSHW-LOGO-MINI]  81.53,29.46 0 bottom
LOGO28  SFE_LOGO_FLAME.1_INCH  [SFE_LOGO_FLAME_.1]  77.98,23.88 0 top
LOGO29  SFE_LOGO_NAME.1_INCH  [SFE_LOGO_NAME_.1]  97.28,26.42 0 bottom
LOGO30  QWIIC_LOGO_CONNECTOR  [QWIIC_5.5MM]  88.39,29.46 0 bottom
LOGO31  OSHW-LOGOMINI  [OSHW-LOGO-MINI]  107.44,29.46 0 bottom
LOGO32  SFE_LOGO_FLAME.1_INCH  [SFE_LOGO_FLAME_.1]  103.89,23.88 0 top
LOGO33  SFE_LOGO_NAME.1_INCH  [SFE_LOGO_NAME_.1]  19.56,39.62 0 bottom
LOGO34  QWIIC_LOGO_CONNECTOR  [QWIIC_5.5MM]  10.67,42.67 0 bottom
LOGO35  OSHW-LOGOMINI  [OSHW-LOGO-MINI]  29.72,42.67 0 bottom
LOGO36  SFE_LOGO_FLAME.1_INCH  [SFE_LOGO_FLAME_.1]  26.16,37.08 0 top
LOGO37  SFE_LOGO_NAME.1_INCH  [SFE_LOGO_NAME_.1]  45.47,39.62 0 bottom
LOGO38  QWIIC_LOGO_CONNECTOR  [QWIIC_5.5MM]  36.58,42.67 0 bottom
LOGO39  OSHW-LOGOMINI  [OSHW-LOGO-MINI]  55.63,42.67 0 bottom
LOGO40  SFE_LOGO_FLAME.1_INCH  [SFE_LOGO_FLAME_.1]  52.07,37.08 0 top
LOGO41  SFE_LOGO_NAME.1_INCH  [SFE_LOGO_NAME_.1]  71.37,39.62 0 bottom
LOGO42  QWIIC_LOGO_CONNECTOR  [QWIIC_5.5MM]  62.48,42.67 0 bottom
LOGO43  OSHW-LOGOMINI  [OSHW-LOGO-MINI]  81.53,42.67 0 bottom